# Altium PCB nRF-Intro-PCB.PcbDoc (part 1 of 2)
Units mil, origin at the board's own origin, x right, y up, seen from the top; angles counter-clockwise.
Board outline 1445.74 x 1165.1 mil, 6 copper layers (Top Layer, L2, L3, L4, L5, Bottom Layer), stack 61.312 mil thick; 53 components, 64 nets, 253 pads, 226 vias.
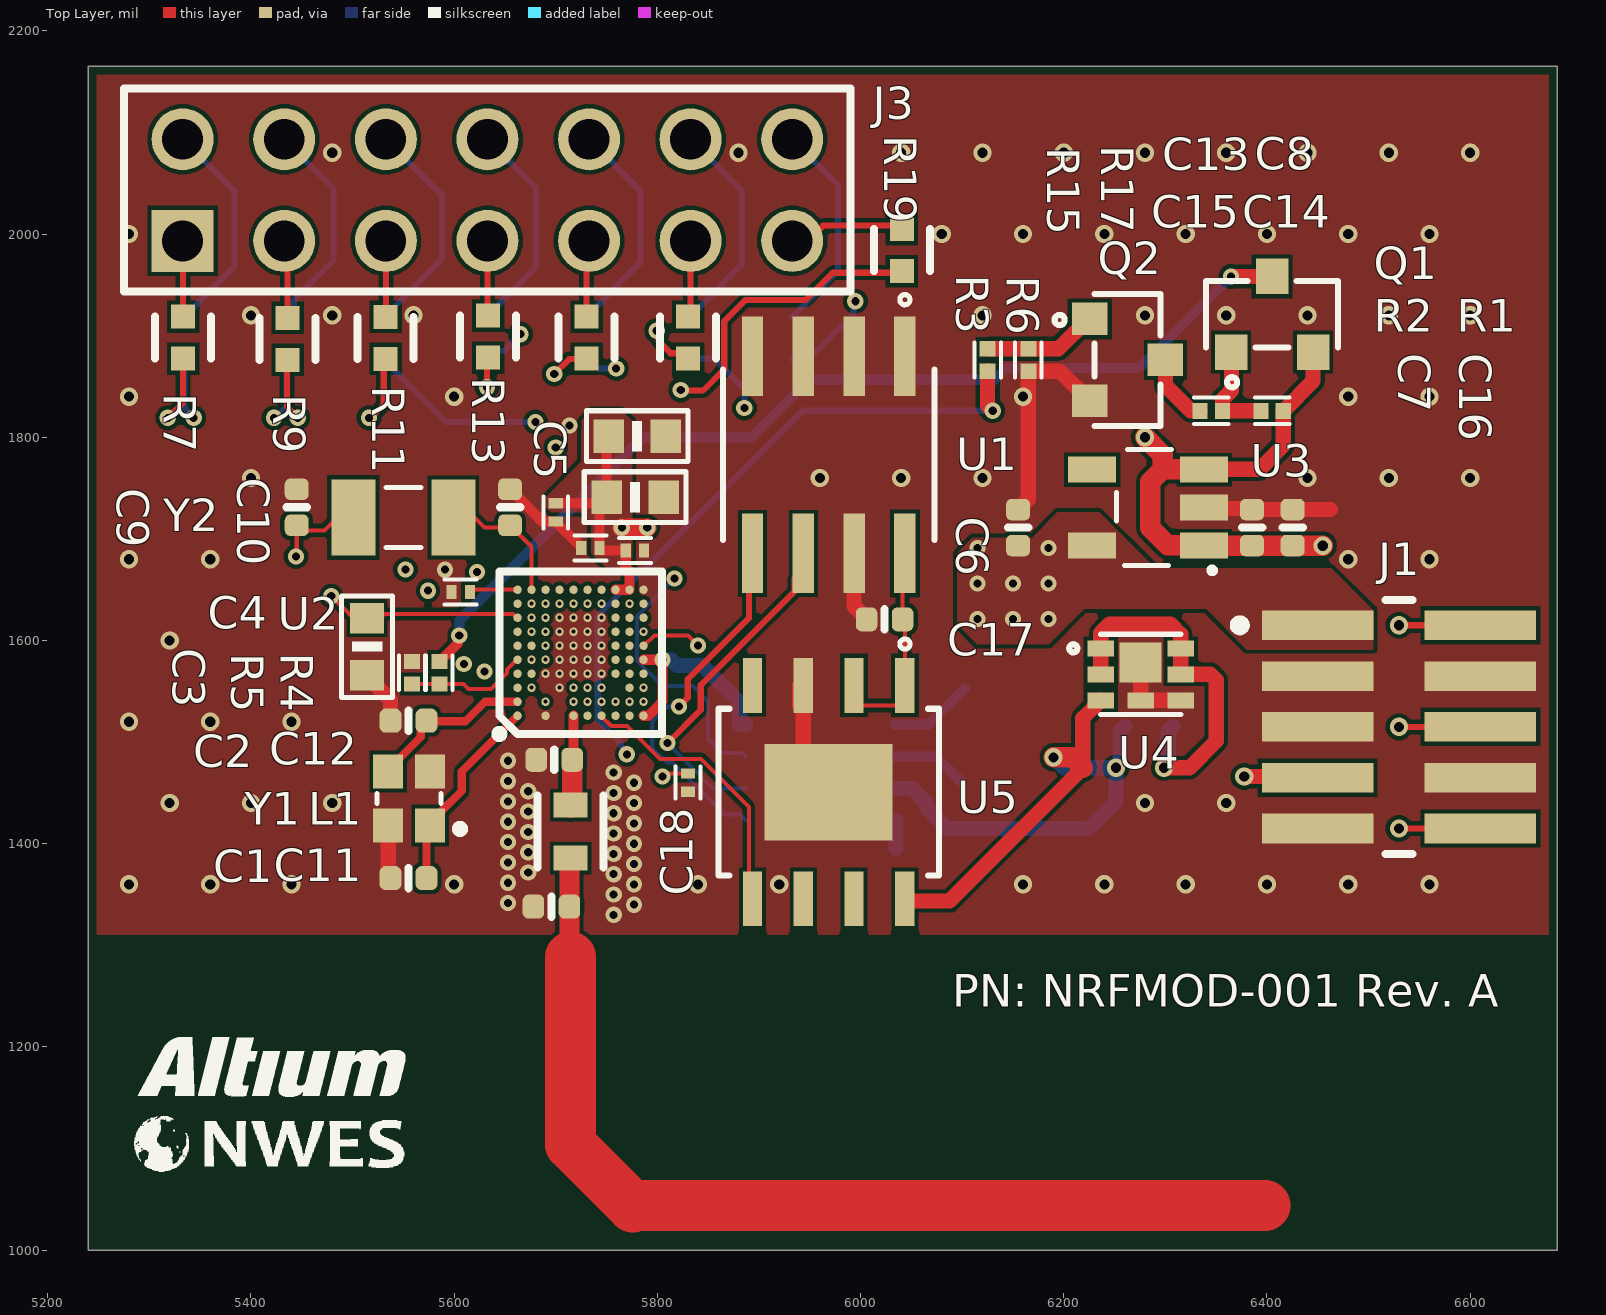
[diagram p0: Top Layer view]
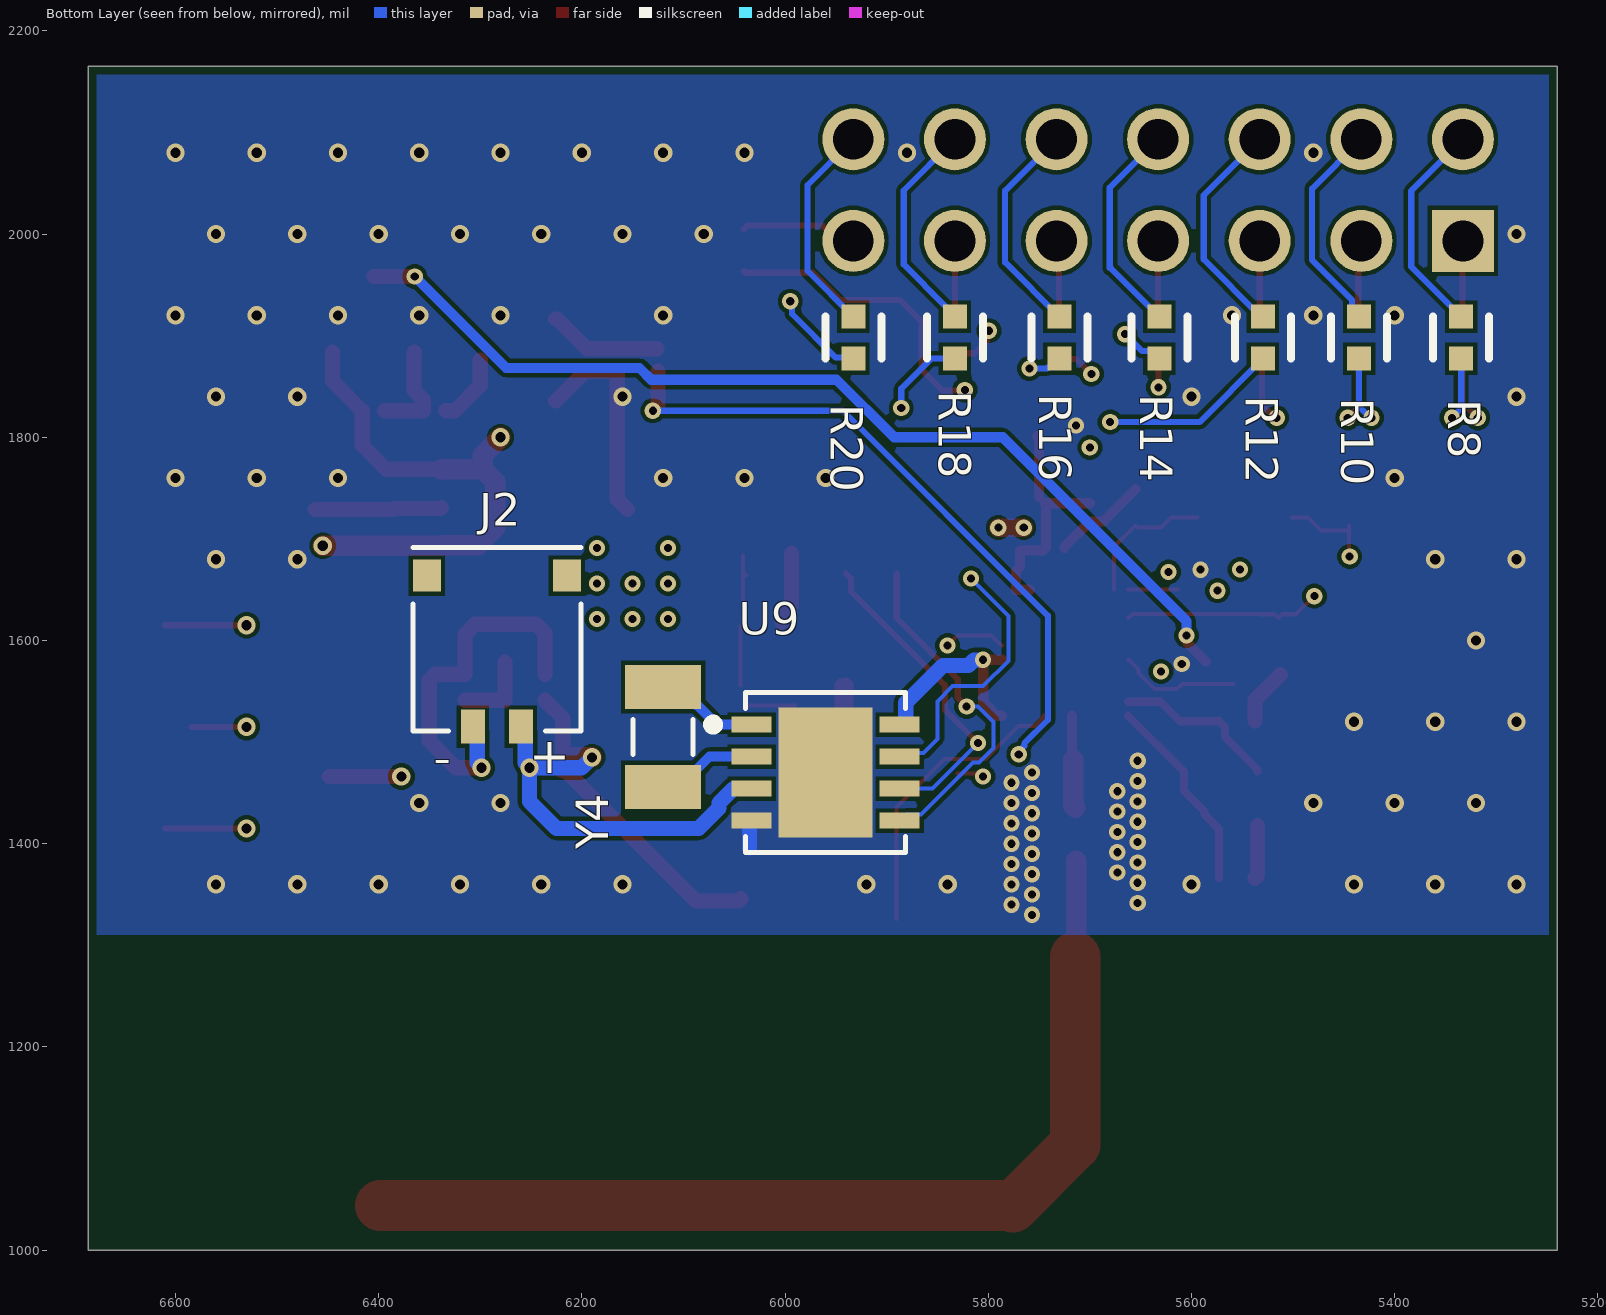
[diagram p1: Bottom Layer view, seen from below]
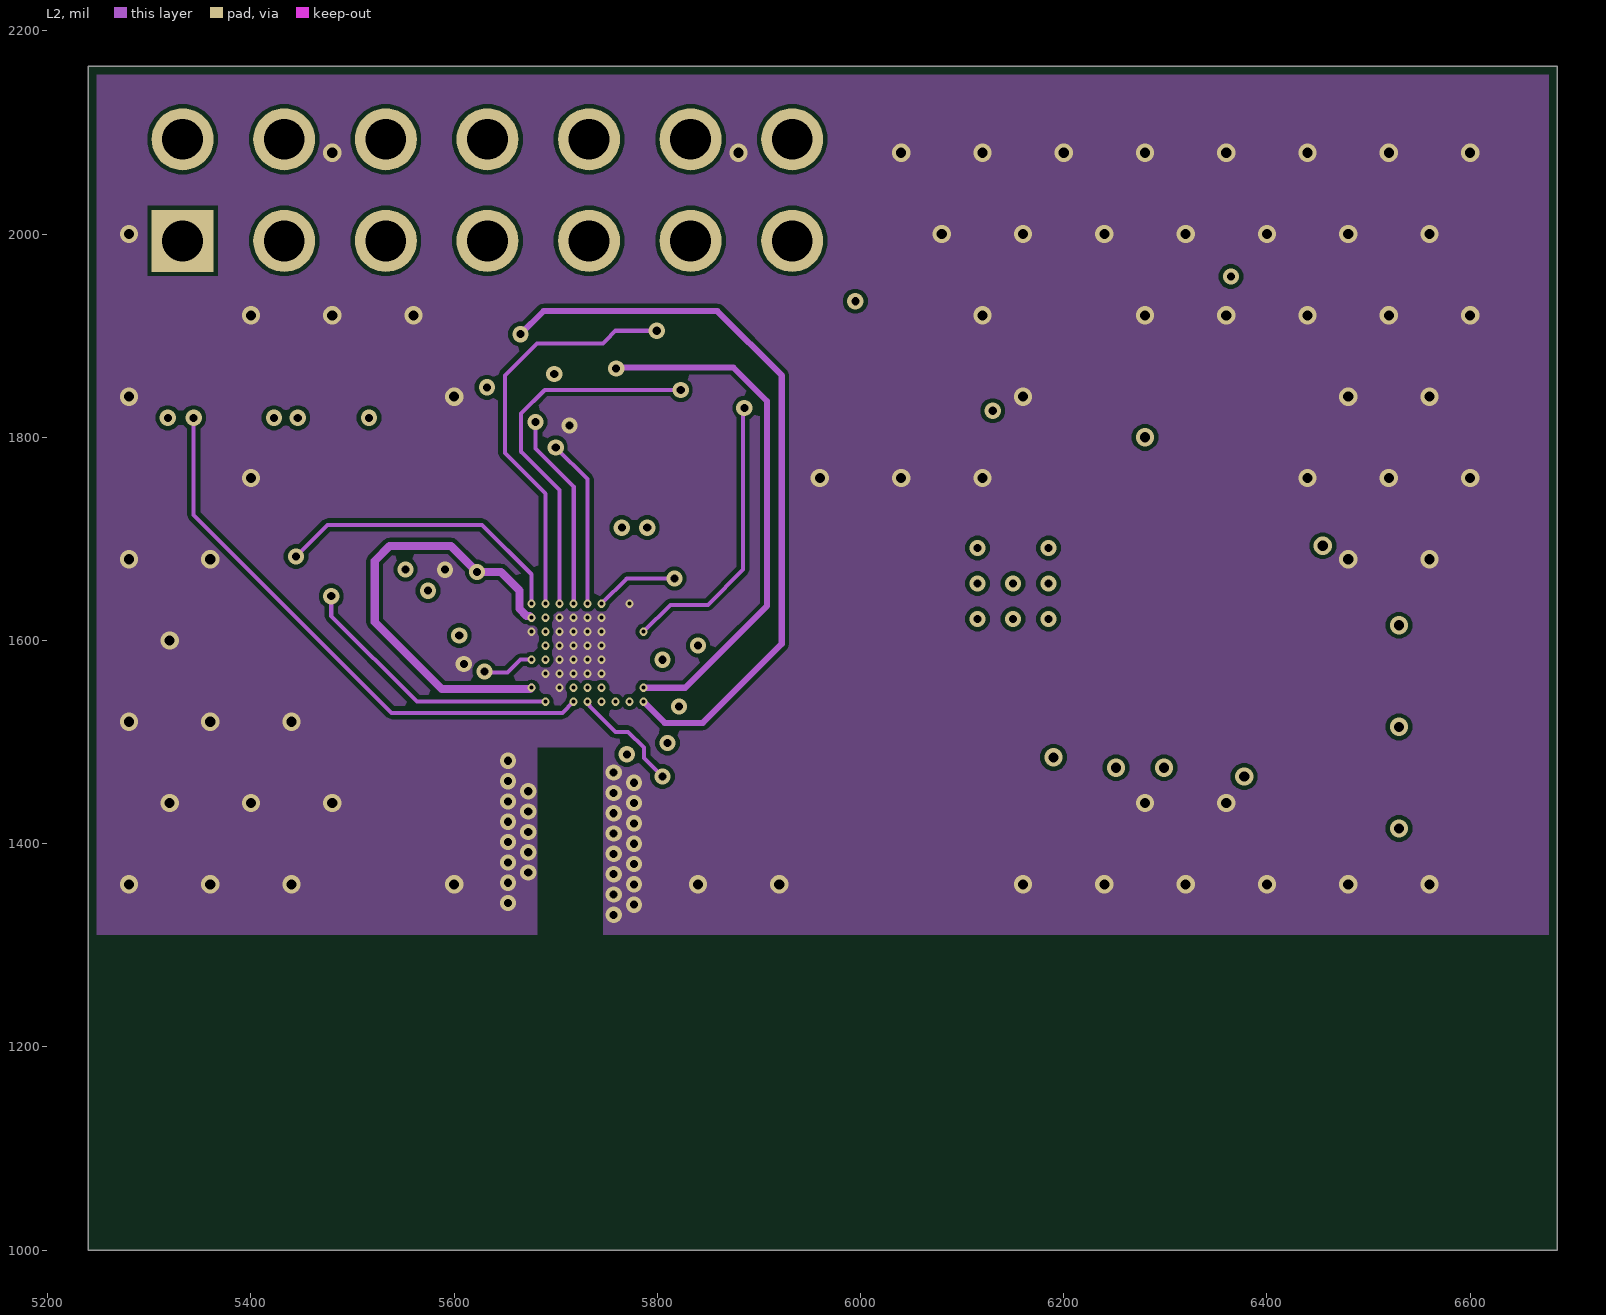
[diagram p2: L2]
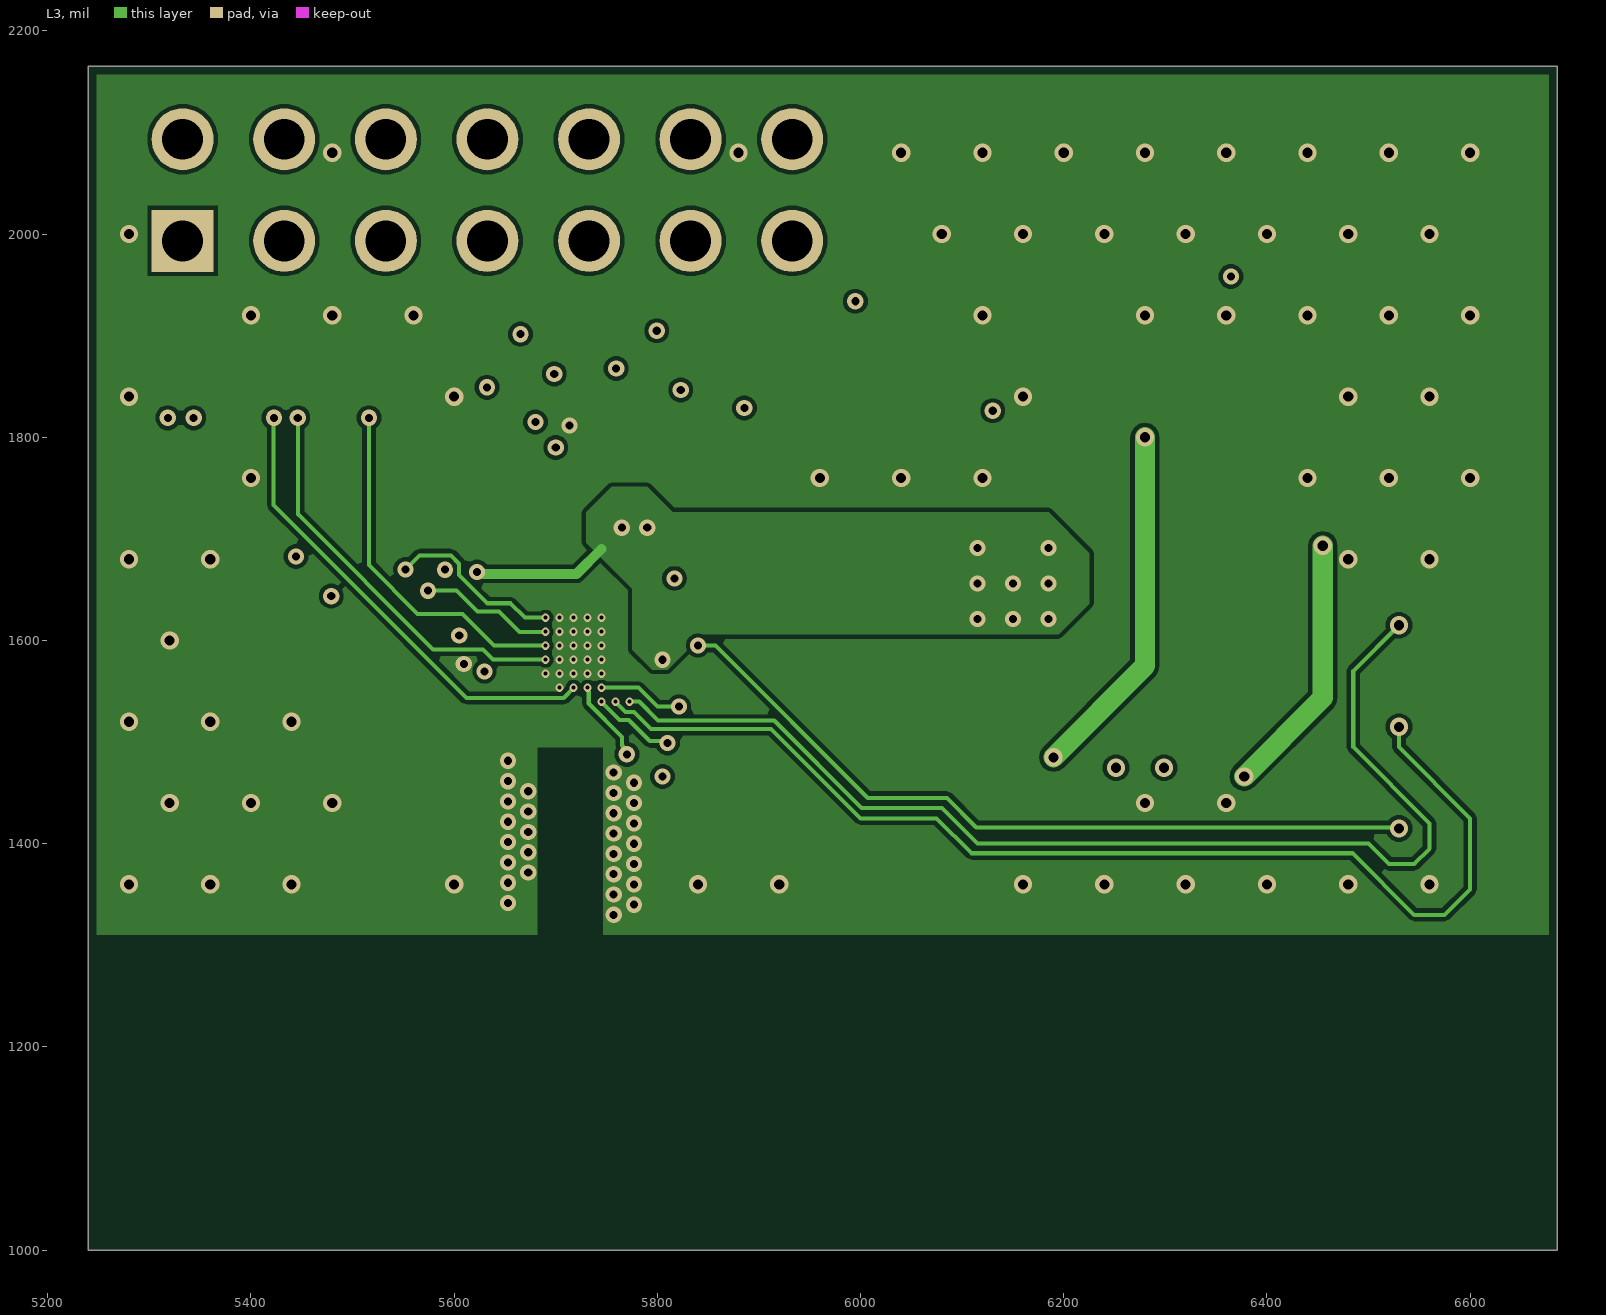
[diagram p3: L3]
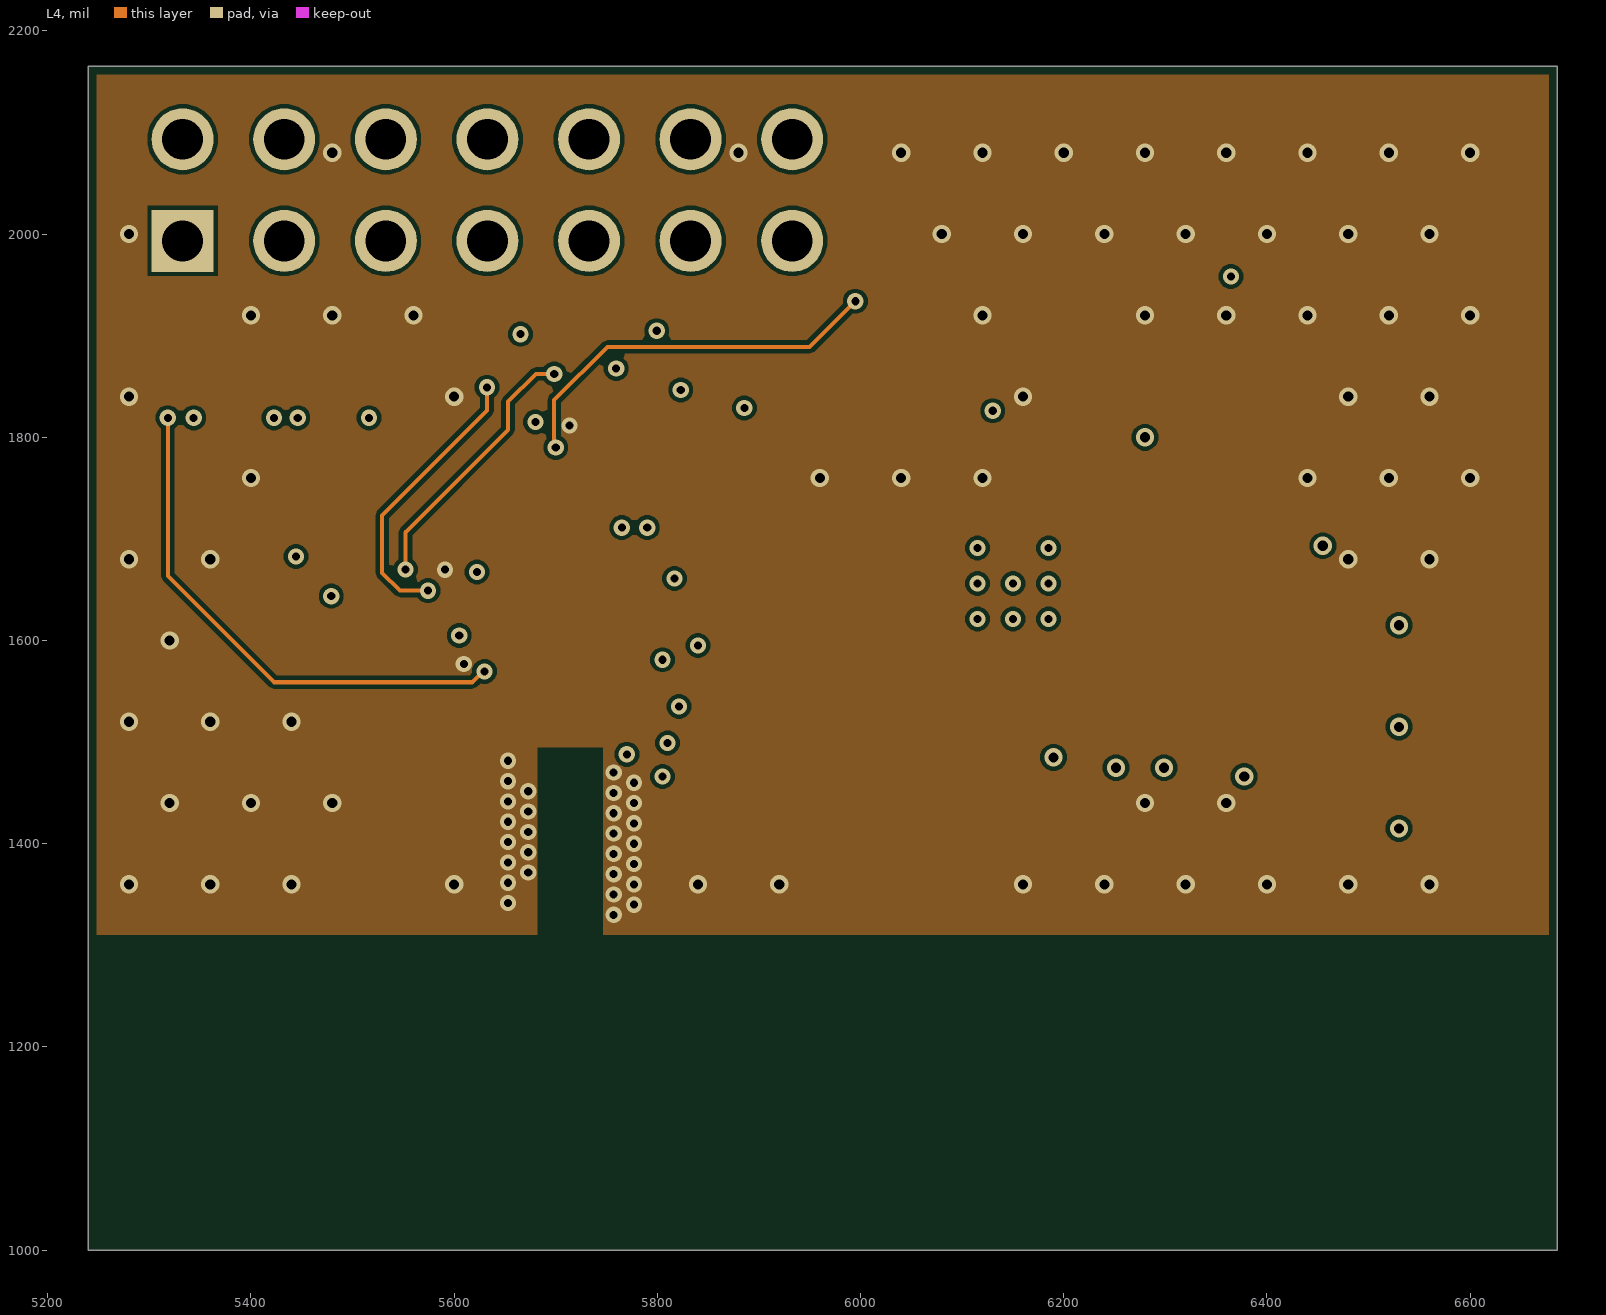
[diagram p4: L4]
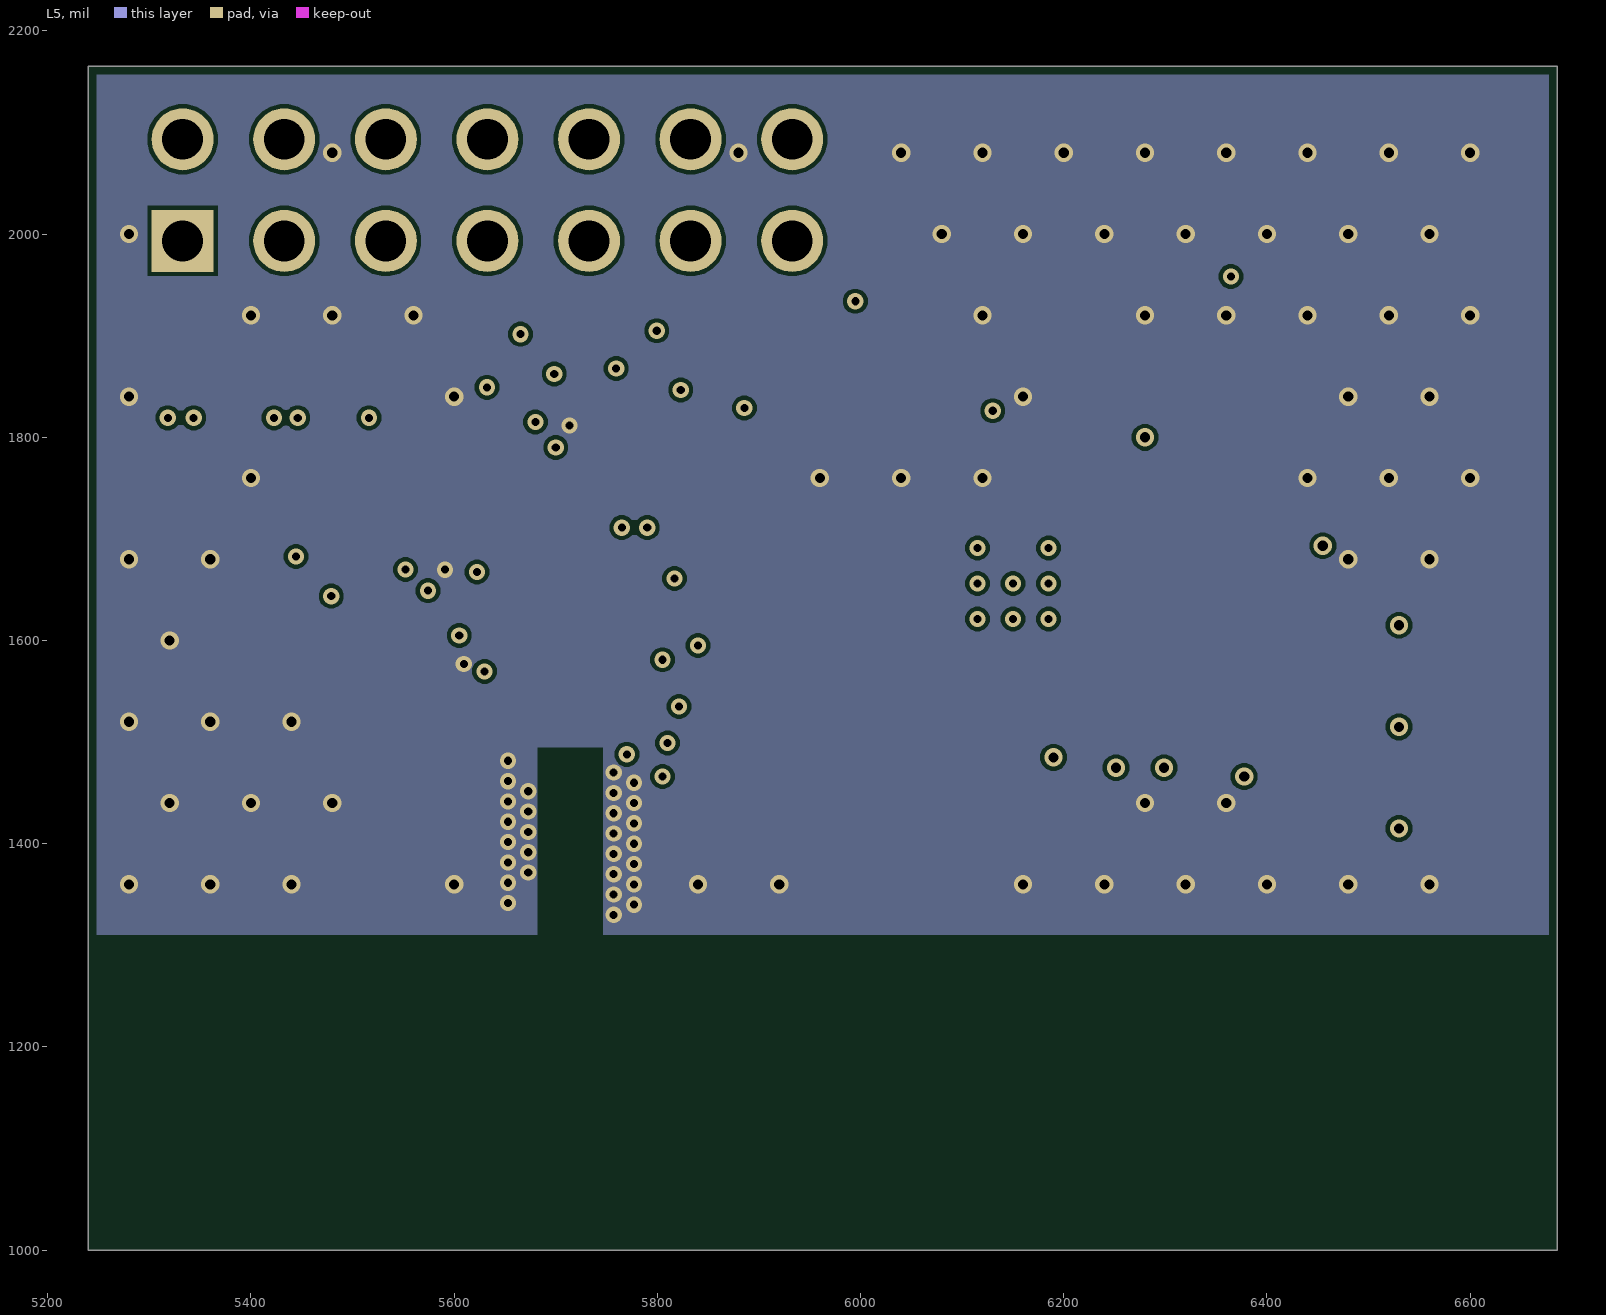
[diagram p5: L5]
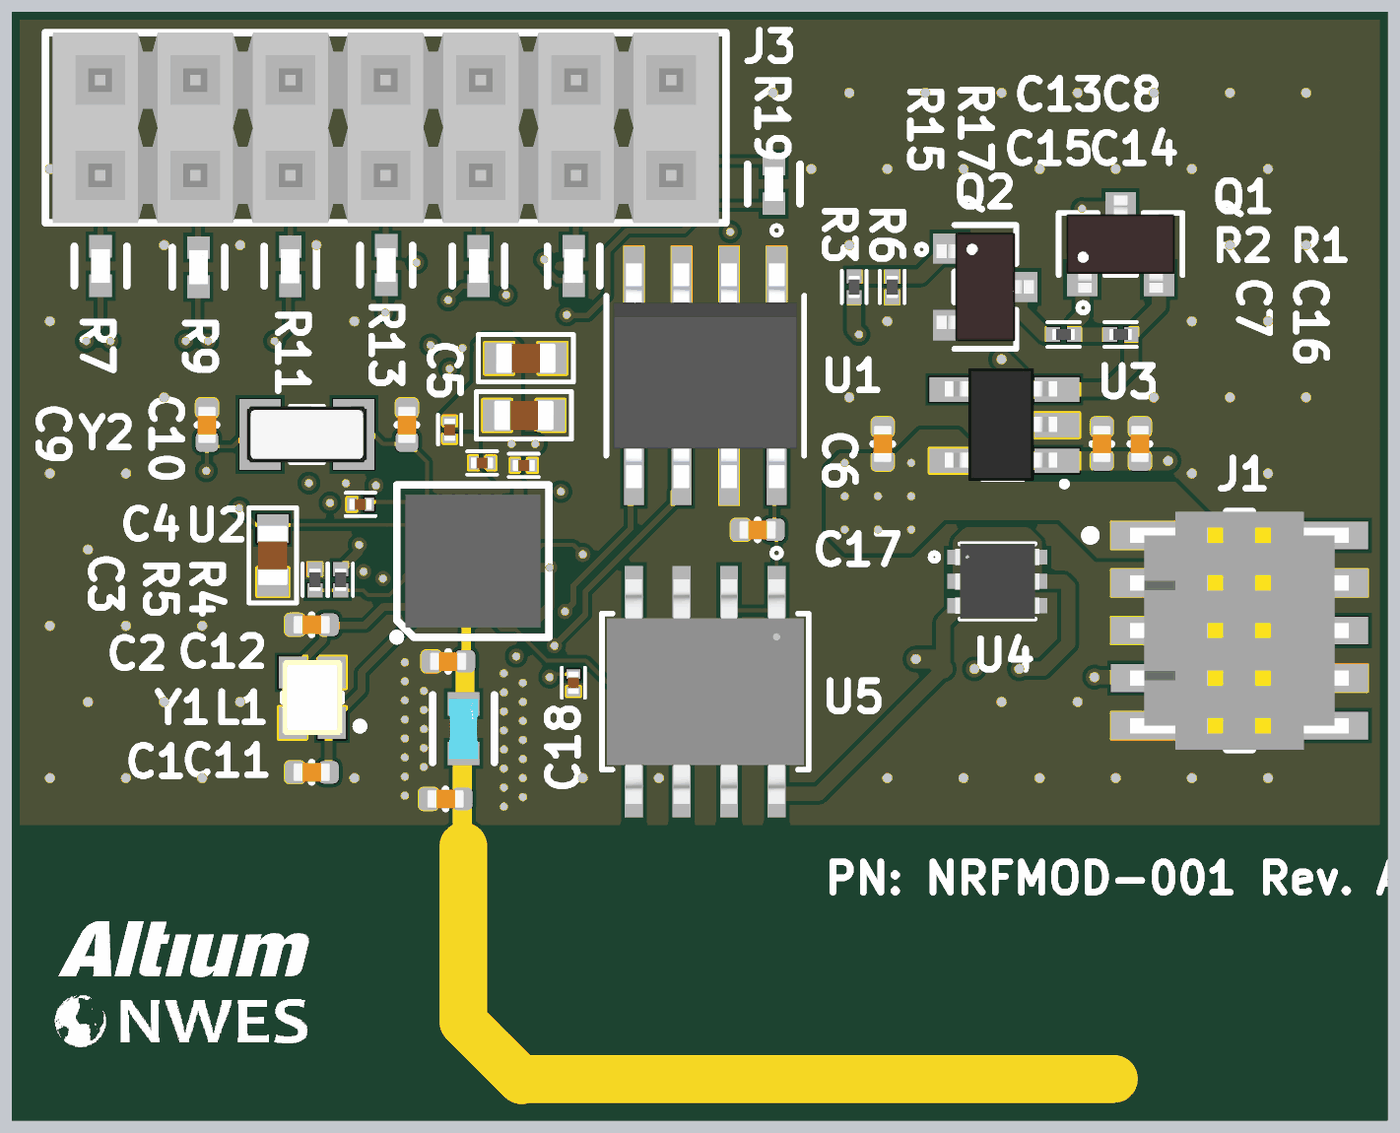
[diagram p6: 3D render of the assembled board from above, using the file's embedded part models]
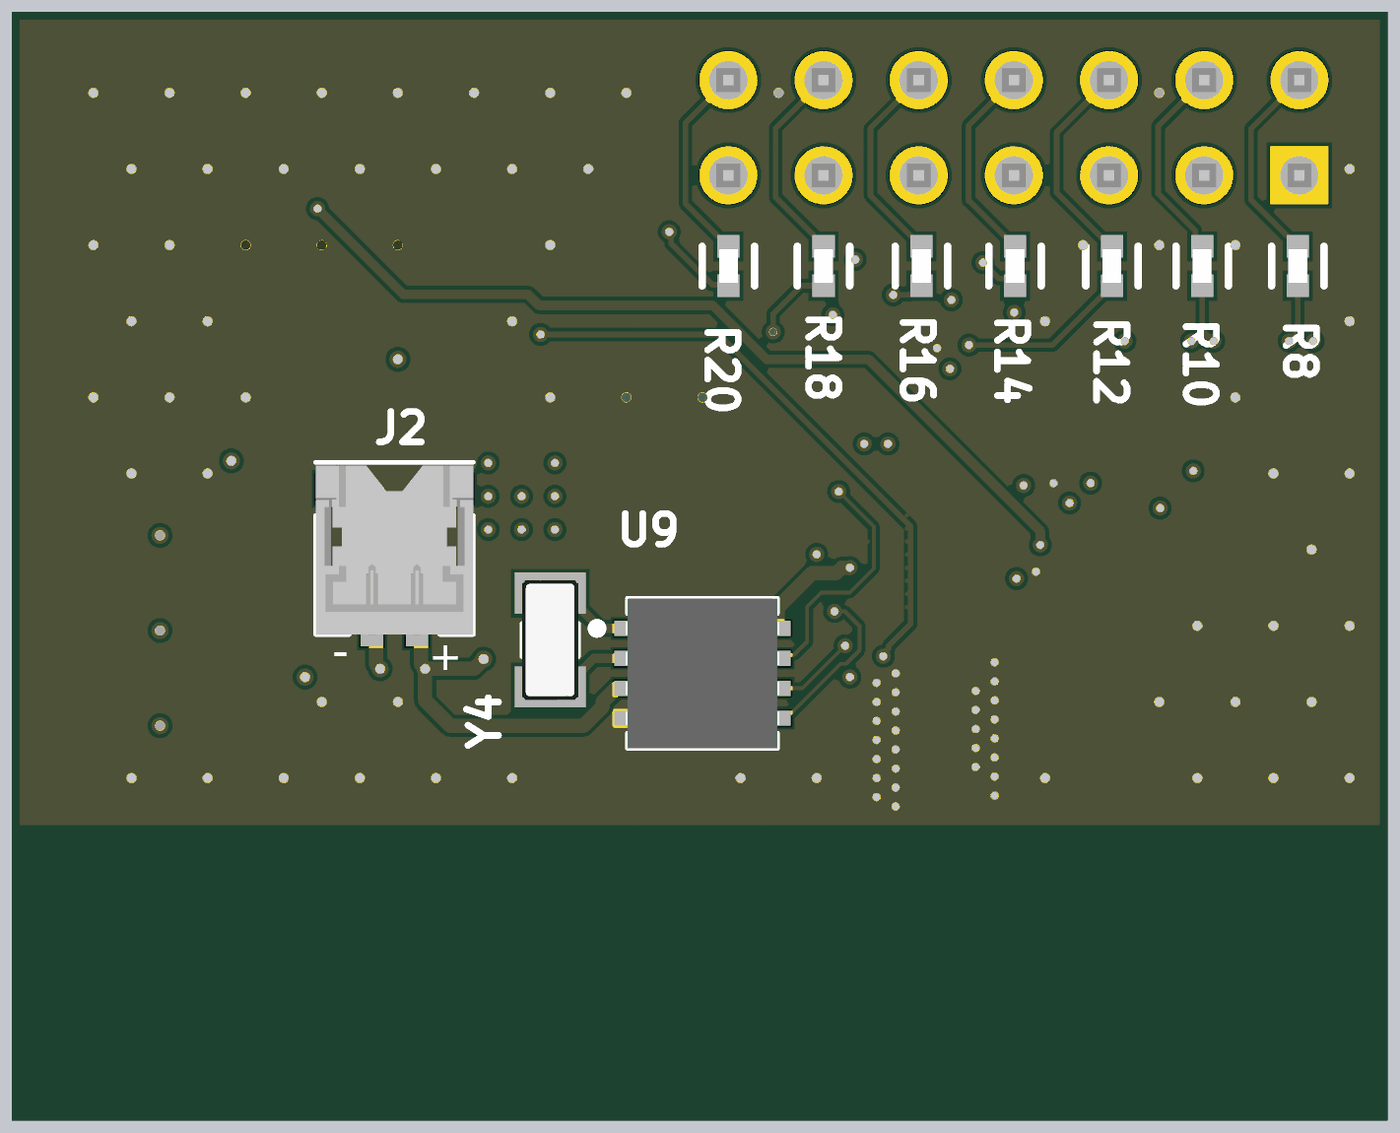
[diagram p7: 3D render of the assembled board from below, using the file's embedded part models]

## Layer stack, top to bottom
Top Solder: solder mask 0.4, Solder Resist, Dk 3.5
Top Layer: signal copper 1.4
Dielectric 2: prepreg 4, PP-006, Dk 4
L2: signal copper 1.378
Dielectric 4: prepreg 4, PP-006, Dk 4
L3: signal copper 1.378
Dielectric 1: dielectric 37, FR-4, Dk 4.8
L4: signal copper 1.378
Dielectric 5: prepreg 4, PP-006, Dk 4
L5: signal copper 1.378
Dielectric 3: prepreg 4, PP-006, Dk 4
Bottom Layer: signal copper 1.4
Bottom Solder: solder mask 0.4, Solder Resist, Dk 3.5

## Board outline
5240,1000 5240,2165.1 6685.73,2165.1 6685.73,1000

## Design rules (kind name [scope] priority, off if disabled: settings)
BoardOutlineClearance [All] p1: gap=8 ignorepadtopadclearanceinfootprint=FALSE
Clearance [All] p1: gap=4 ignorepadtopadclearanceinfootprint=TRUE
HoleToHoleClearance HoleToHoleBuried [InDrillLayerPair('L2 - L3') vs InDrillLayerPair('Top Layer - Bottom Layer')] p1 off: gap=10 allowstackedmicrovias=TRUE
HoleToHoleClearance HoleToHoleBlind [InDrillLayerPair('Top Layer - L2') vs InDrillLayerPair('L2 - L3')] p2 off: gap=0 allowstackedmicrovias=TRUE
HoleToHoleClearance [All] p3 off: gap=10 allowstackedmicrovias=TRUE
MinimumSolderMaskSliver [All] p1: minsoldermaskwidth=1
NetAntennae [InNet('ANT')] p1: netantennaetolerance=99999
PlaneClearance [All] p1: clearance=10
PlaneConnect [All] p1: planeconnectstyle=Direct reliefexpansion=20 reliefentries=4 reliefconductorwidth=10 reliefairgap=10
PolygonConnect [All] p1: connectstyle=Direct reliefconductorwidth=10 reliefentries=4 polygonreliefangle="90 Angle" airgapwidth=10
RoutingVias [All] p1: holewidth=28 width=50 viastyle="Through Hole" minholewidth=4 minwidth=8 maxholewidth=10 maxwidth=18
SilkToSilkClearance [All] p1: silktosilkclearance=4
SilkToSolderMaskClearance [IsPad] p1: minsilkscreentomaskgap=1 clearancetoexposedcopper=TRUE
SolderMaskExpansion SolderMaskExpansion_1 [IsVia] p1: expansion=4 istentingtop=TRUE
SolderMaskExpansion [All] p2: expansion=1 istentingtop=FALSE
Width Width_ANT [InNet('ANT')] p1: maxlimit=50 minlimit=8 preferedwidth=10
Width [All] p2: maxlimit=20 minlimit=4 preferedwidth=6
23 further rules are at their usual default settings.

## Components (designator, comment, footprint, x,y, rotation, side; value= is the part's Value field where it differs from the comment)
C1 "12pF" CAPC1005X55USR 5555.1,1366.09 r180 top
C2 "12pF" CAPC1005X55USR 5555.1,1521.09 r180 top
C3 "1.0uF" CAPC1608 5514.27,1593.96 r270 top
C4 "0.1uF" CAPC0603X33N 5606.43,1647.64 r180 top
C5 "0.1uF" CAPC0603X33N 5700.1,1726.09 r270 top
C6 "2.2uF" CAPC1005X55USR 6155.1,1711.09 r270 top
C7 "1uF" CAPC1005X55USR 6385.37,1711.09 r270 top
C8 "1.0uF" CAPC1608 5778.1,1741.09 r0 top
C9 "12pF" CAPC1005X55USR 5445.1,1731.09 r90 top
C10 "12pF" CAPC1005X55USR 5655.1,1731.09 r90 top
C11 "1.2pF" CAPC1005X55USR 5695.8,1338.08 r0 top
C12 "1.2pF" CAPC1005X55USR 5698.56,1482.62 r0 top
C13 "4.7uF" CAPC1608 5780.1,1801.09 r180 top
C14 "0.1uF" CAPC0603X33N 5777.95,1688.53 r180 top
C15 "0.1uF" CAPC0603X33N 5734.17,1691.09 r0 top
C16 "1uF" CAPC1005X55USR 6425.37,1711.09 r270 top
C17 "1uF" CAPC1005X55USR 6023.68,1620.78 r0 top
C18 "820pF" CAPC0603X33N 5830.1,1460.15 r270 top
J1 "FTSH-105-01-F-DV-K" SMTC-FTSH-105-01-L-DV-K_V 6530,1515 r270 top
J2 "0781710002" MOLEX_0781710002 6283.62,1663.75 r0 bottom
J3 "MTSW-107-07-L-D-170" SMTC-MTSW-107-07-X-D-170 5332.81,1993.33 r0 top
L1 "54060392400" FP-LQW18AN_00-MFG 5714.68,1411.89 r90 top
Q1 "MMBT3906,215" SOT-23 6405.1,1921.09 r0 top
Q2 "MMBT3904,215" SOT-23 6262.9,1876.09 r270 top
R1 "100K" RESC0603X26N 6405.1,1826.09 r0 top
R2 "12K" RESC0603X26N 6345.1,1826.09 r0 top
R3 "12K" RESC0603X26N 6125.1,1876.09 r90 top
R4 "12K" RESC0603X26N 5585.54,1568.38 r270 top
R5 "5.6K" RESC0603X26N 5558.55,1568.38 r270 top
R6 "100K" RESC0603X26N 6165.1,1876.09 r90 top
R7 "CRCW040222R0JNED" FP-CRCW0402-e3-MFG 5333.28,1898 r90 top
R8 "CRCW040222R0JNED" FP-CRCW0402-e3-MFG 5334.46,1898 r270 bottom
R9 "CRCW040222R0JNED" FP-CRCW0402-e3-MFG 5436.13,1896.82 r90 top
R10 "CRCW040222R0JNED" FP-CRCW0402-e3-MFG 5434.93,1898 r270 bottom
R11 "CRCW040222R0JNED" FP-CRCW0402-e3-MFG 5532.71,1897.88 r90 top
R12 "CRCW040222R0JNED" FP-CRCW0402-e3-MFG 5529.71,1898 r270 bottom
R13 "CRCW040222R0JNED" FP-CRCW0402-e3-MFG 5633.51,1898.97 r90 top
R14 "CRCW040222R0JNED" FP-CRCW0402-e3-MFG 5631.6,1898 r270 bottom
R15 "CRCW040222R0JNED" FP-CRCW0402-e3-MFG 5730.45,1898 r90 top
R16 "CRCW040222R0JNED" FP-CRCW0402-e3-MFG 5729.94,1898 r270 bottom
R17 "CRCW040222R0JNED" FP-CRCW0402-e3-MFG 5830.34,1898 r90 top
R18 "CRCW040222R0JNED" FP-CRCW0402-e3-MFG 5832.81,1898 r270 bottom
R19 "CRCW040222R0JNED" FP-CRCW0402-e3-MFG 6040.66,1984.2 r90 top
R20 "CRCW040222R0JNED" FP-CRCW0402-e3-MFG 5932.81,1898 r270 bottom
U1 "CAT24C512WI-GT3" SOIC-8 5968.68,1782.78 r270 top
U2 "NRF52840-CKAA-R7" BGA94C35P10X10_354X361X51 5724.43,1587.98 r90 top
U3 "TPS70933DBVR" SOT23-5 6283.02,1730.79 r90 top
U4 "FR015L3EZ" MLP6_2X2_ONS 6275.73,1566.68 r0 top
U5 "BD33HC0MEFJ-ME2" HTSOP-J8_ROM 5968.68,1450.78 r270 top
U9 "PCF8523TK/1,118" HVSON80P400X400X100-9N 5960,1470 r180 bottom
Y1 "32MHz" XTAL_2016_ECS_320 5555.77,1444.51 r180 top
Y2 "32.768kHz" XTAL_3215#1 5550.1,1721.09 r180 top
Y4 "32.768kHz" XTAL_3215#2 6120,1505 r90 bottom

## Footprints (in the part's own frame and the unit in brackets; to place one, negate y for a bottom-side part, rotate by r counter-clockwise, add the part's x,y. Pads: shape width x height; smd on the part's side, far side on the other; paste and mask are expansions set on the pad)
BGA94C35P10X10_354X361X51 [mm]
  round 0.212 smd mask+0.025: A1(-1.575,1.575) A2(-1.225,1.575) A3(-0.875,1.575) A4(-0.525,1.575) A5(-0.175,1.575) A6(0.175,1.575) A7(0.525,1.575) A8(0.875,1.575) A9(1.225,1.575) A10(1.575,1.575) B3(-0.875,1.225) B4(-0.525,1.225) B5(-0.175,1.225) B6(0.175,1.225) B7(0.525,1.225) B8(0.875,1.225) B9(1.225,1.225) B10(1.575,1.225) C1(-1.575,0.875) C2(-1.225,0.875) C4(-0.525,0.875) C5(-0.175,0.875) C6(0.175,0.875) C7(0.525,0.875) C8(0.875,0.875) C9(1.225,0.875) C10(1.575,0.875) D3(-0.875,0.525) D4(-0.525,0.525) D5(-0.175,0.525) D6(0.175,0.525) D7(0.525,0.525) D8(0.875,0.525) D9(1.225,0.525) D10(1.575,0.525) E1(-1.575,0.175) E2(-1.225,0.175) E3(-0.875,0.175) E4(-0.525,0.175) E5(-0.175,0.175) E6(0.175,0.175) E7(0.525,0.175) E8(0.875,0.175) E9(1.225,0.175) E10(1.575,0.175) F1(-1.575,-0.175) F2(-1.225,-0.175) F3(-0.875,-0.175) F4(-0.525,-0.175) F5(-0.175,-0.175) F6(0.175,-0.175) F7(0.525,-0.175) F8(0.875,-0.175) F9(1.225,-0.175) F10(1.575,-0.175) G1(-1.575,-0.525) G2(-1.225,-0.525) G3(-0.875,-0.525) G4(-0.525,-0.525) G5(-0.175,-0.525) G6(0.175,-0.525) G7(0.525,-0.525) G8(0.875,-0.525) G9(1.225,-0.525) G10(1.575,-0.525) H1(-1.575,-0.875) H2(-1.225,-0.875) H4(-0.525,-0.875) H5(-0.175,-0.875) H6(0.175,-0.875) H7(0.525,-0.875) H8(0.875,-0.875) H9(1.225,-0.875) H10(1.575,-0.875) J1(-1.575,-1.225) J2(-1.225,-1.225) J3(-0.875,-1.225) J4(-0.525,-1.225) J5(-0.175,-1.225) J6(0.175,-1.225) J7(0.525,-1.225) J8(0.875,-1.225) J9(1.225,-1.225) J10(1.575,-1.225) K1(-1.575,-1.575) K2(-1.225,-1.575) K3(-0.875,-1.575) K4(-0.525,-1.575) K5(-0.175,-1.575) K6(0.175,-1.575) K7(0.525,-1.575) K8(0.875,-1.575) K9(1.225,-1.575) K10(1.575,-1.575)
  silkscreen extent -2.13,-2.03 2.03,2.13, body extent -1.77,-1.8 1.77,1.8, height 0.51
CAPC0603X33N [mil]
  rect 10x14 smd mask+2: 1(-9.06,0) 2(9.06,0)
  silkscreen extent -16,-12 16,12, body extent -12,-6 12,6, height 13
CAPC1005X55USR [mm] "Capacitor, Chip; 1.00 mm L X 0.50 mm W X 0.55 mm H body"
  rrect52% 0.54x0.6 smd mask+0.025: 1(-0.45,0) 2(0.45,0)
  silkscreen extent 0,-0.25 0,0.25, body extent -0.5,-0.25 0.5,0.25, height 0.55
CAPC1608 [mil] "C0603"
  rect 30x33 smd mask+2: 1(-28,0) 2(28,0)
  silkscreen extent -50,-25 50,25, body extent -31,-16 31,16, height 35
FP-CRCW0402-e3-MFG [mm]
  rect 0.6x0.6 smd paste+0 mask+0: 1(-0.525,0) 2(0.525,0)
  silkscreen extent -0.53,-0.7 0.53,0.7, body extent -0.92,-0.4 0.92,0.4, height 0.25
FP-LQW18AN_00-MFG [mm]
  rect 0.625x0.85 smd paste+0 mask+0: 1(-0.663,0) 2(0.663,0)
  silkscreen extent -0.9,-0.82 0.9,0.82, body extent -1.07,-0.6 1.07,0.6, height 0.25
HTSOP-J8_ROM [mil]
  rect 54x19 smd paste+0 mask+0: 1(-105,75) 2(-105,25) 3(-105,-25) 4(-105,-75) 5(105,-75) 6(105,-25) 7(105,25) 8(105,75)
  rect 95x126 smd paste-62.5 mask+0: 9(0,0)
  silkscreen extent -151,-109 82,109, body extent -118,-104 118,104, height 39
HVSON80P400X400X100-9N [mm]
  rect 1x0.4 smd mask+0.051: 1(-1.85,1.2) 2(-1.85,0.4) 3(-1.85,-0.4) 4(-1.85,-1.2) 5(1.85,-1.2) 6(1.85,-0.4) 7(1.85,0.4) 8(1.85,1.2)
  rect 2.35x3.25 smd mask+0.051: 9(0,0)
  silkscreen extent -2.94,-2 2,2, body extent -2.05,-2 2.05,2, height 1
MLP6_2X2_ONS [mm]
  rect 0.67x0.4 smd paste+0 mask+0: 1(-1,0.65) 2(-1,0) 3(-1,-0.65) 4(1,-0.65) 5(1,0) 6(1,0.65)
  rect 0.66x0.4 smd paste+0 mask+0: 7(0,-0.65)
  rect 1.05x1 smd paste+0 mask+0: 7(0,0.3)
  silkscreen extent -1.79,-1 1,1, body extent -1.12,-1 1.12,1, height 0.81
MOLEX_0781710002 [mm]
  rect 0.6x0.85 smd mask+0.051: 1(-0.6,3.775) 2(0.6,3.775)
  rect 0.7x0.8 smd mask+0.051: S1(-1.75,0) S2(1.75,0)
  silkscreen extent -2.1,-0.71 2.1,3.88, body extent -2.1,-0.62 2.1,3.91, height 1.45
RESC0603X26N [mm]
  rect 0.38x0.4 smd mask+0.025: 1(-0.281,0) 2(0.281,0)
  silkscreen extent -0.43,-0.33 0.43,0.33, body extent -0.3,-0.15 0.3,0.15, height 0.26
SMTC-FTSH-105-01-L-DV-K_V [mm] "CONN, 10-Leads, Body 6.35x3.43mm, Pitch 1.27mm"
  rect 0.74x2.79 smd: 1(-2.54,-2.035) 2(-2.54,2.035) 3(-1.27,-2.035) 4(-1.27,2.035) 5(0,-2.035) 6(0,2.035) 7(1.27,-2.035) 8(1.27,2.035) 9(2.54,-2.035) 10(2.54,2.035)
  silkscreen extent -3.17,-4.1 3.17,0.34, body extent -3.17,-2.92 3.18,2.92, height 6.12
SMTC-MTSW-107-07-X-D-170 [mm] "Assembly .025\" [.64] SQ Post Terminal Strip, 2x7 Pins, Vertical, 2.54mm Pitch, Male"
  rect 1.55x1.55 hole 1.02: 1(0,0)
  round 1.55 hole 1.02: 2(0,2.54) 3(2.54,0) 4(2.54,2.54) 5(5.08,0) 6(5.08,2.54) 7(7.62,0) 8(7.62,2.54) 9(10.16,0) 10(10.16,2.54) 11(12.7,0) 12(12.7,2.54) 13(15.24,0) 14(15.24,2.54)
  silkscreen extent -1.46,-1.27 16.7,3.81, body extent -1.27,-1.27 16.51,3.81, height 6.86
SOIC-8 [mil]
  rect 78x21 smd: 1(-97,75) 2(-97,25) 3(-97,-25) 4(-97,-75) 5(97,-75) 6(97,-25) 7(97,25) 8(97,75)
  silkscreen extent -158,-104 84,104, body extent -118,-97 118,97, height 69
SOT23-5 [mm]
  rect 0.65x1.2 smd mask+0.05: 1(-0.95,-1.4) 2(0,-1.4) 3(0.95,-1.4) 4(0.95,1.4) 5(-0.95,1.4)
  silkscreen extent -1.59,-1.62 1.45,0.79, body extent -1.48,-1.41 1.52,1.59, height 1.4
SOT-23 [mil]
  rect 32x35 smd paste+0 mask+0: 1(-40.35,-37.2) 2(40.35,-37.2) 3(0,37.2)
  silkscreen extent -65,-72 65,33, body extent -57,-51 57,51, height 45
XTAL_2016_ECS_320 [mm]
  rect 0.75x0.85 smd mask+0.051: 1(-0.525,0.675) 2(-0.525,-0.675) 3(0.525,-0.675) 4(0.525,0.675)
  silkscreen extent -1.37,-0.12 0.8,0.86, body extent -0.8,-1 0.8,1, height 0.5
XTAL_3215#1 [mm]
  rect 1.1x1.9 smd: 1(-1.25,0) 2(1.25,0)
  silkscreen extent -0.44,-0.75 0.44,0.75, body extent -1.6,-0.75 1.6,0.75, height 0.89
XTAL_3215#2 [mm]
  rect 1.1x1.9 smd mask+0: 1(-1.25,0) 2(1.25,0)
  silkscreen extent -0.44,-0.75 0.44,0.75, body extent -1.6,-0.75 1.6,0.75, height 0.89

## Part data
C1 C2 C9 C10: library part "CAP CER 12PF 50V C0G/NP0 0402", "CAP CER 12PF 50V C0G/NP0 0402", Manufacturer=YAGEO, Manufacturer Part Number=CC0402GRNPO9BN120, Package=0402, Supplier Part Number 1=311-3609-1-ND, Height=0.55mm, Supplier 1=Digi-Key
C3 C8: library part "CAP CER 1UF 16V X7R 0603", "CAP CER 1UF 16V X7R 0603", Manufacturer=KEMET, Manufacturer Part Number=C0603C105K4RAC7867, Package=0603, Supplier Part Number 1=399-C0603C105K4RAC7867CT-ND, Height=0.9mm, Supplier 1=Digi-Key
C4 C5 C14 C15: library part "CAP CER 0.1UF 6.3V X7R 0201", "CAP CER 0.1UF 6.3V X7R 0201", Manufacturer=YAGEO, Manufacturer Part Number=CC0201KRX7R5BB104, Package=0201, Supplier Part Number 1=13-CC0201KRX7R5BB104CT-ND, Height=0.33mm, Supplier 1=Digi-Key
C6: library part "CAP CER 2.2UF 25V X5R 0402", "CAP CER 2.2UF 25V X5R 0402", Manufacturer="Murata Electronics", Manufacturer Part Number=GRM155R61E225ME15D, Package=0402, Supplier Part Number 1=490-10457-1-ND, Height=0.55mm, Supplier 1=Digi-Key
C7 C16 C17: library part "CAP CER 1UF 25V X5R 0402", "CAP CER 1UF 25V X5R 0402", Manufacturer="Murata Electronics", Manufacturer Part Number=GRM155C81E105ME11J, Package=0402, Supplier Part Number 1=490-GRM155C81E105ME11JCT-ND, Height=0.6mm, Supplier 1=Digi-Key
C11 C12: library part "CAP CER 1.2PF 50V C0G/NP0 0402", "CAP CER 1.2PF 50V C0G/NP0 0402", Manufacturer="Murata Electronics", Manufacturer Part Number=GCM1555C1H1R2BA16D, Package=0402, Supplier Part Number 1=490-16453-1-ND, Height=0.55mm, Supplier 1=Digi-Key
C13: library part "CAP CER 4.7UF 6.3V X7R 0603", "CAP CER 4.7UF 6.3V X7R 0603", Manufacturer="Taiyo Yuden", Manufacturer Part Number=JMK107BB7475KA-T, Package=0603, Supplier Part Number 1=587-5870-1-ND, Height=1.0mm, Supplier 1=Digi-Key
C18: library part "CAP CER 820PF 25V X7R 0201", "CAP CER 820PF 25V X7R 0201", Manufacturer=YAGEO, Manufacturer Part Number=CC0201KRX7R8BB821, Package=0201, Supplier Part Number 1=311-3698-1-ND, Height=0.33mm, Supplier 1=Digi-Key
J1: library part CMP-2000-05352-1, "Male Header, Pitch 1.27 mm, 2 x 5 Position, Height 6.12 mm, RoHS, Tube", Color=Black, Manufacturer=Samtec, Package Description="Male Header, Pitch 1.27 mm, 2 x 5 Position, Height 5.97 mm, Tail Length 4.32 mm", Package Reference=FTSH-105-01-L-DV-K, Category=Connectors,Interconnects, Connector Type=Header,Shrouded, Contact Finish=Gold, Contact Finish Thickness=3µin(0.08µm), Contact Mating Length="0.120\"(3.05mm)", Contact Type=MalePin, Datasheet URL=http://suddendocs.samtec.com/prints/ftsh-1xx-xx-xxx-dv-xxx-mkt.pdf, Datasheet Version="Rev. ET, 10/1995", Family=RectangularConnectors-Headers,MalePins, Fastening Type=-, Features=-, Manufacturer URL=http://www.samtec.com/, Mounting Type=SurfaceMount, Number of Positions=10, Number of Positions Loaded=All, Number of Rows=2, Package URL=http://suddendocs.samtec.com/prints/ftsh-1xx-xx-xxx-dv-xxx-footprint.pdf, Packaging=Tube, Pitch="0.050\"(1.27mm)", Row Spacing="0.050\"(1.27mm)", Series=FTSH, Termination=Solder
J2: library part CONN_0781710002, "Pico-EZmate Wire-to-Board Header Vertical Housing Height 1.55mm with Side Friction Locks 2 Circuits", Color=Black, Contact Resistance=20mR, Manufacturer=Molex, Max Operating Temperature=85°C, Max Voltage Rating (AC)=50V, Min Operating Temperature=-25°C, Supplier Part Number 1=WM4459CT-ND, Category="Headers and Wire Housings", ComponentLink1Description=https://datasheet.ciiva.com/738/781710002-sd-738384.pdf?src-supplier=Digi-Key, ComponentLink1URL=https://datasheet.ciiva.com/738/781710002-sd-738384.pdf?src-supplier=Digi-Key, ComponentLink2Description=https://datasheet.ciiva.com/738/781710002-sd-738387.pdf?src-supplier=Digi-Key, ComponentLink2URL=https://datasheet.ciiva.com/738/781710002-sd-738387.pdf?src-supplier=Digi-Key, ComponentLink3Description=https://datasheet.ciiva.com/738/781710002-sd-738390.pdf?src-supplier=Digi-Key, ComponentLink3URL=https://datasheet.ciiva.com/738/781710002-sd-738390.pdf?src-supplier=Digi-Key, Connector Type=Plug, Contact Material="Copper Alloy", Contact Plating=Gold, Contact Type=Tab, Depth=4.5mm, Fastening Type=Friction, Housing Color=Black, Housing Material=Polymer, Length=4.2mm, Manufacturer Part Number=0781710002, Max Voltage Rating (DC)=50V, Mount="Surface Mount", Number of Contacts=2, Number of Positions=2, Number of Rows=1, Orientation=Straight, Packaging="Tape and Reel", Pitch=1.2mm, Pricing 1="1=0.40000, 10=0.32600, 100=0.23890, 1000=0.19000 (USD)", Radiation Hardening=No, RoHS=Yes, RoHS Compliant=Yes, Series="Pico-EZmate™ 78171", Stock 1=156886, Supplier 1=Digi-Key, Termination=Solder
J3: library part CMP-1024-00128-1, "Modified .025\" SQ Post Header, Through-hole, Vertical, -55 to 125 degC, 2.54 mm Pitch, 14-Pin, Male, RoHS", Manufacturer=Samtec, Temperature Range="-55 to 125 degC", ComponentLink1Description="Manufacturer URL", ComponentLink1URL=http://www.samtec.com, ComponentLink2Description=Datasheet, ComponentLink2URL=http://www.samtec.com/documents/webfiles/pdf/MTSW.PDF, ComponentLink3Description="Package Specification", ComponentLink3URL=http://www.samtec.com/documents/webfiles/cpdf/MTSW-XXX-XX-X-X-XXXX-XX-XXX-MKT1.pdf, DatasheetVersion=F-214, Mounting Technology=Through-hole, Orientation=Vertical, PackageDescription="Assembly .025\" [.64] SQ Post Terminal Strip", PackageReference=MTSW-107-07-X-D-170, PackageVersion="BI, 2/1987", PartNumber=MTSW-107-07-L-D-170, Pitch="2.54 mm", RoHS=True
L1: library part CMP-06042-012062-1, "Fixed Inductors RF Chip Inductor SMD 3.9nH 0603 10% Tol", Case Code (Imperial)=0603, Case Code (Metric)=1608, Current=200mA, Current Rating=750mA, DC Resistance (DCR)=82mR, Inductance=3.9nH, Manufacturer=Sumida, Max Operating Temperature=125°C, Min Operating Temperature=-55°C, Package Quantity=4000, Resistor Type=Wirewound, Self Resonant Frequency=6GHz, Series Resistance=35mR, Test Frequency=100MHz, Tolerance=2%, Case/Package=0603, Core Material=Non-Magnetic, DC Current=750mA, Depth=1mm, Height=0.8mm, Height - Seated (Max)=0.039inch, Lead Free="Lead Free", Length=1.6mm, Manufacturer Part  Number=54060392400, Max DC Current=750mA, Military Standard=Not, Mount="Surface Mount", Packaging="Tape and Reel", Q Factor=35, Radiation Hardening=No, Shielding=Unshielded, Termination=SMD/SMT, Weight=0.000106oz, Width=0.031inch
Q1: library part PNP_MMBT3906,215, "TRANS PNP 40V 0.2A TO236AB", Manufacturer=Nexperia, Supplier Part Number 1=1727-4045-1-ND, Category=BJTs, ComponentLink1Description=http://www.farnell.com/datasheets/454048.pdf?src-supplier=Farnell, ComponentLink1URL=http://www.farnell.com/datasheets/454048.pdf?src-supplier=Farnell, ComponentLink2Description=https://assets.nexperia.com/documents/data-sheet/MMBT3906.pdf?src-supplier=Digi-Key, ComponentLink2URL=https://assets.nexperia.com/documents/data-sheet/MMBT3906.pdf?src-supplier=Digi-Key, ComponentLink3Description=http://www.nxp.com/packings/SOT23_215.html?src-supplier=Farnell, ComponentLink3URL=http://www.nxp.com/packings/SOT23_215.html?src-supplier=Farnell, Manufacturer Part Number=MMBT3906,215, Pricing 1="1=0.14000, 10=0.12800, 100=0.06970, 500=0.04290, 1000=0.02926 (USD)", RoHS=Yes, RoHS Compliant=Yes, Stock 1=1789, Supplier 1=Digi-Key
Q2: library part NPN_MMBT3904,215, "TRANS NPN 40V 0.2A SOT23", Manufacturer=Nexperia, Supplier Part Number 1=1727-4044-1-ND, Category=BJTs, ComponentLink1Description=http://www.farnell.com/datasheets/2328888.pdf?src-supplier=Farnell, ComponentLink1URL=http://www.farnell.com/datasheets/2328888.pdf?src-supplier=Farnell, ComponentLink2Description=https://assets.nexperia.com/documents/data-sheet/MMBT3904.pdf?src-supplier=Digi-Key, ComponentLink2URL=https://assets.nexperia.com/documents/data-sheet/MMBT3904.pdf?src-supplier=Digi-Key, ComponentLink3Description=http://www.farnell.com/datasheets/2328888.pdf?src-supplier=Newark, ComponentLink3URL=http://www.farnell.com/datasheets/2328888.pdf?src-supplier=Newark, Manufacturer Part Number=MMBT3904,215, Pricing 1="1=0.13000, 10=0.11800, 100=0.06440, 500=0.03964, 1000=0.02703 (USD)", RoHS=Yes, RoHS Compliant=Yes, Stock 1=1634308, Supplier 1=Digi-Key
R1 R6: library part "RES 100K OHM 1% 1/20W 0201", "RES 100K OHM 1% 1/20W 0201", Manufacturer=Yageo, Manufacturer Part Number=RC0201FR-07100KL, Package=0201, Supplier Part Number 1=311-100KMCT-ND, Height=0.26mm, Supplier 1=Digi-Key
R2 R3 R4: library part "RES 12K OHM 1% 1/20W 0201", "RES 12K OHM 1% 1/20W 0201", Manufacturer=Yageo, Manufacturer Part Number=RC0201FR-0712KL, Package=0201, Supplier Part Number 1=311-12.0KMCT-ND, Height=0.26mm, Supplier 1=Digi-Key
R5: library part "RES 5.6K OHM 1% 1/20W 0201", "RES 5.6K OHM 1% 1/20W 0201", Manufacturer=Yageo, Manufacturer Part Number=RC0201FR-075K6L, Package=0201, Supplier Part Number 1=YAG2346CT-ND, Height=0.26mm, Supplier 1=Digi-Key
R7 R8 R9 R10 R11 R12 R13 R14 R15 R16 R17 R18 R19 R20: library part CMP-1011-00034-3, "RES Thick Film, 22Ω, 5%, 0.063W, 200ppm/°C, 0402", Case Code (Imperial)=0402, Case Code (Metric)=1005, Max Operating Temperature=155°C, Max Power Dissipation=63mW, Min Operating Temperature=-55°C, Package Quantity=1, Resistance=22R, Temperature Coefficient=200ppm/°C, Tolerance=5%, Voltage Rating=50V, Case/Package=0402, Composition="Thick Film", Contact Plating=Tin, Depth=0.5mm, Features="Automotive AEC-Q200", Height=0.016inch, Length=1mm, Military Standard=Not, Number of Pins=2, Number of Terminations=2, Packaging="Tape and Reel", Power Rating=63mW, Termination=SMD/SMT, Weight=2.3E-05oz, Width=0.5mm
U1: "IC EEPROM 512KBIT 1MHZ 8SOIC", Case/Package=SOIC, Frequency=100kHz, Manufacturer="ON Semiconductor", Max Frequency=400kHz, Max Operating Temperature=85°C, Max Supply Voltage=5.5V, Min Operating Temperature=-40°C, Min Supply Voltage=1.8V, Nominal Supply Current=2.5mA, Operating Supply Voltage=5V, Package Quantity=1, Supplier Part Number 1=863-CAT24C512WI-GT3, Access Time=3500ns, Access Time-Max=900ns, Category=EEPROM, ComponentLink1Description=https://datasheet.ciiva.com/22618/1674429-22618480.pdf?src-supplier=Element14, ComponentLink1URL=https://datasheet.ciiva.com/22618/1674429-22618480.pdf?src-supplier=Element14, ComponentLink2Description=https://datasheet.ciiva.com/25627/0900766b810de298-25627756.pdf?src-supplier=RSComponents, ComponentLink2URL=https://datasheet.ciiva.com/25627/0900766b810de298-25627756.pdf?src-supplier=RSComponents, Contact Plating=Gold, Density=512Kb, Halogen Free="Halogen Free", Height=1.5mm, Interface=I2C,Serial,2-Wire, Lead Free="Lead Free", Length=5mm, Manufacturer Part Number=CAT24C512WI-GT3, Memory Size=512Kb, Memory Type=EEPROM, Mount="Surface Mount", Number of Pins=8, Number of Words=64000, Organization=32KX8, Packaging="Tape and Reel", Pricing 1="1=0.68000, 10=0.62300, 50=0.61200, 100=0.54700, 1000=0.51600, 10000=0.50800 (USD)", Radiation Hardening=No, REACH SVHC="No SVHC", RoHS=Yes, RoHS Compliant=Yes, Series=-, Stock 1=254725, Supplier 1=Mouser, Supply Current=2.5mA, Supply Voltage-Nom=5.5V, Width=4mm, Write Cycle Time-Max (tWC)=5ms, Write Protection=YES
U2: "Advanced Bluetooth 5, Thread and Zigbee multiprotocol SoC", Manufacturer="Nordic Semiconductor", Supplier Part Number 1=949-NRF52840-CKAA-R7, Category="RF Receivers, Transceivers", Manufacturer Part Number=NRF52840-CKAA-R7, Pricing 1="1=6.69000, 10=6.04000, 50=5.76000, 100=5.00000, 1000=5.00000, 10000=5.00000 (USD)", RoHS=Yes, Supplier 1=Mouser
U3: "Linear Voltage Regulator IC Positive Fixed 1 Output 3.3V 150mA SOT-23-5", Case/Package=SOT-23-5, Dropout Voltage=960mV, Manufacturer="Texas Instruments", Max Input Voltage=30V, Max Operating Temperature=125°C, Max Output Current=150mA, Min Current Limit=200mA, Min Input Voltage=2.7V, Min Operating Temperature=-40°C, Nominal Output Voltage=3.3V, Output Voltage Accuracy=1%, Package Quantity=1, Power Supply Rejection Ratio (PSRR)=80dB, Quiescent Current=1uA, Supplier Part Number 1=296-35483-1-ND, Accuracy=2%, Category="Voltage Regulators - Linear", ComponentLink1Description=https://datasheet.ciiva.com/6580/tps70933-6580912.pdf?src-supplier=Digi-Key, ComponentLink1URL=https://datasheet.ciiva.com/6580/tps70933-6580912.pdf?src-supplier=Digi-Key, ComponentLink2Description=https://datasheet.ciiva.com/6580/tps709-6580908.pdf?src-supplier=Digi-Key, ComponentLink2URL=https://datasheet.ciiva.com/6580/tps709-6580908.pdf?src-supplier=Digi-Key, ComponentLink3Description=https://datasheet.ciiva.com/6580/tps709-6580911.pdf?src-supplier=Digi-Key, ComponentLink3URL=https://datasheet.ciiva.com/6580/tps709-6580911.pdf?src-supplier=Digi-Key, Lead Free="Lead Free", Manufacturer Part Number=TPS70933DBVR, Mount="Surface Mount", Number Of Outputs=1, Number of Pins=5, Number of Regulators=1, Output Current=150mA, Output Type=Fixed, Output Voltage=3.3V, Packaging="Tape and Reel", Polarity=Positive, Pricing 1="1=1.37000, 10=1.22300, 25=1.16040, 100=0.95330, 250=0.89108, 500=0.78748, 1000=0.62560 (USD)", Radiation Hardening=No, REACH SVHC="No SVHC", RoHS=Yes, RoHS Compliant=Yes, Series=-, Stock 1=84982, Supplier 1=Digi-Key
U4: "LOW SIDE REV BIAS POLAR PROTECT", Breakdown Voltage=14.5V, Clamping Voltage=15V, Current=8A, Manufacturer="ON Semiconductor / Fairchild", Max Operating Temperature=125°C, Max Power Dissipation=2.4W, Min Operating Temperature=-55°C, Operating Supply Voltage=8V, Package Quantity=3000, Supplier Part Number 1=512-FR015L3EZ, Voltage=1.3V, Category="EMI / RFI Components", ComponentLink1Description=https://datasheet.ciiva.com/13084/fr015l3ez-113107-13084211.pdf?src-supplier=Mouser, ComponentLink1URL=https://datasheet.ciiva.com/13084/fr015l3ez-113107-13084211.pdf?src-supplier=Mouser, ComponentLink2Description=https://datasheet.ciiva.com/6702/fr015l3ez-6702465.pdf?src-supplier=Digi-Key, ComponentLink2URL=https://datasheet.ciiva.com/6702/fr015l3ez-6702465.pdf?src-supplier=Digi-Key, Height=0.725mm, Lead Free="Lead Free", Length=2mm, Manufacturer Part Number=FR015L3EZ, Mount="Surface Mount", Number of Channels=1, Number of Circuits=1, Number Of Outputs=1, Number of Pins=6, Packaging="Tape and Reel", Peak Pulse Power=2.4W, Polarity=Unidirectional, Pricing 1="1=0.71000, 10=0.62700, 50=0.62700, 100=0.48000, 1000=0.30400, 10000=0.26700 (USD)", RoHS=Yes, RoHS Compliant=Yes, Series=FR015, Stock 1=21380, Supplier 1=Mouser, Termination=SMD/SMT, Weight=0.03g, Width=2mm, Working Voltage=8V
U5: "LDO Regulator Pos 3.3V 1A Automotive 8-Pin HTSOP-J EP T/R", Dropout Voltage=600mV, Input Bias Current=600uA, Manufacturer=Rohm, Max Input Voltage=8V, Max Operating Temperature=105°C, Max Output Current=1A, Max Power Dissipation=2.11W, Min Input Voltage=4.5V, Min Operating Temperature=-40°C, Nominal Output Voltage=3.3V, Package Quantity=1, Supplier Part Number 1=BD33HC0MEFJ-ME2CT-ND, Category="Voltage Regulators - Linear", ComponentLink1Description=https://datasheet.ciiva.com/29568/bdxxhc0mefj-m-e-29568538.pdf?src-supplier=Digi-Key, ComponentLink1URL=https://datasheet.ciiva.com/29568/bdxxhc0mefj-m-e-29568538.pdf?src-supplier=Digi-Key, ComponentLink2Description=https://datasheet.ciiva.com/29568/bdxxhc0mefj-m-e-29568539.pdf?src-supplier=Digi-Key, ComponentLink2URL=https://datasheet.ciiva.com/29568/bdxxhc0mefj-m-e-29568539.pdf?src-supplier=Digi-Key, ComponentLink3Description=https://datasheet.ciiva.com/29569/bdxxhc0mefj-m-e-29569161.pdf?src-supplier=Digi-Key, ComponentLink3URL=https://datasheet.ciiva.com/29569/bdxxhc0mefj-m-e-29569161.pdf?src-supplier=Digi-Key, ComponentLink4Description=https://datasheet.ciiva.com/48677/bdxxhc0mefj-m-e-48677678.pdf?src-supplier=Avnet, ComponentLink4URL=https://datasheet.ciiva.com/48677/bdxxhc0mefj-m-e-48677678.pdf?src-supplier=Avnet, Manufacturer Part Number=BD33HC0MEFJ-ME2, Mount="Surface Mount", Number Of Outputs=1, Number of Pins=8, Number of Regulators=1, Output Current=1A, Output Type=Fixed, Output Voltage=3.3V, Packaging="Tape and Reel", Pricing 1="1=1.50000, 10=1.34500, 25=1.27640, 100=1.04830, 250=0.97996, 500=0.86602, 1000=0.68370 (USD)", REACH SVHC=Unknown, RoHS=Yes, RoHS Compliant=Yes, Stock 1=1946, Supplier 1=Digi-Key
U9: "PCF8523 Series 5.5 V 1 Mbps I2C Interface Real Time Clock / Calendar - HVSON-8", Case/Package=HVSON, Manufacturer="NXP Semiconductors", Max Operating Temperature=85°C, Max Supply Voltage=5.5V, Min Operating Temperature=-40°C, Min Supply Voltage=1.2V, Package Quantity=6000, Supplier Part Number 1=568-6648-1-ND, Temperature Grade=INDUSTRIAL, Category="Real Time Clocks", ComponentLink1Description=https://datasheet.ciiva.com/1238/pcf8523-1238777.pdf?src-supplier=Digi-Key, ComponentLink1URL=https://datasheet.ciiva.com/1238/pcf8523-1238777.pdf?src-supplier=Digi-Key, ComponentLink2Description=https://datasheet.ciiva.com/1238/pcf8523-1238778.pdf?src-supplier=Digi-Key, ComponentLink2URL=https://datasheet.ciiva.com/1238/pcf8523-1238778.pdf?src-supplier=Digi-Key, ComponentLink3Description=https://datasheet.ciiva.com/1238/pcf8523-1238779.pdf?src-supplier=Digi-Key, ComponentLink3URL=https://datasheet.ciiva.com/1238/pcf8523-1238779.pdf?src-supplier=Digi-Key, ComponentLink4Description=https://datasheet.ciiva.com/8144/pcf8523-8144533.pdf?src-supplier=Avnet, ComponentLink4URL=https://datasheet.ciiva.com/8144/pcf8523-8144533.pdf?src-supplier=Avnet, ComponentLink5Description=https://datasheet.ciiva.com/16355/pcf8523-16355845.pdf?src-supplier=Future+Electronics, ComponentLink5URL=https://datasheet.ciiva.com/16355/pcf8523-16355845.pdf?src-supplier=Future+Electronics, Interface=I2C, Lead Free="Lead Free", Logic Function=Clock, Manufacturer Part Number=PCF8523TK/1,118, Mount="Surface Mount", Number of Pins=8, Packaging="Tape and Reel", Pricing 1="1=1.91000, 10=1.71600, 25=1.61920, 100=1.37950, 250=1.29528, 500=1.13336, 1000=1.02389 (USD)", Radiation Hardening=No, REACH SVHC="No SVHC", RoHS=Yes, RoHS Compliant=Yes, Stock 1=85182, Supplier 1=Digi-Key, Supply Voltage-Nom=5.5V, Time Format=HH:MM:SS
Y1: library part XTAL_ECS-320-8-37BQ-CKY-TR, "Crystal 32MHz 8pF ±10ppm ±10ppm 4-Pin Miniature CSMD T/R", Manufacturer="ECS International", Manufacturer Part Number=ECS-320-8-37BQ-CKY-TR, Supplier Part Number 1=50-ECS-320-8-37BQ-CKY-CT-ND, Pricing 1="1=0.57000, 10=0.47700, 50=0.42960, 100=0.38180, 500=0.36270 (USD)", RoHS=No, Stock 1=8978, Supplier 1=Digi-Key
Y2: library part XTAL_ABS07-32.768KHZ-9-1-T, "ABS07 Series 3.2 x 1.5 x 0.9 mm 32.768 KHz ±10ppm 9 pF -40 to 85°C Crystal SMT", Case/Package=SMD/SMT, ESR (Equivalent Series Resistance)=70kR, Frequency Tolerance=10ppm, Load Capacitance=9pF, Manufacturer=Abracon, Manufacturer Part Number=ABS07-32.768KHZ-9-1-T, Max Operating Temperature=85°C, Min Operating Temperature=-40°C, Operating Frequency="32.768 kHz", Package Quantity=3000, Supplier Part Number 1=815-ABS07-32.7K9-1-T, Category=Crystals, ComponentLink1Description=https://datasheet.ciiva.com/12389/abs07-11028-12389874.pdf?src-supplier=Mouser, ComponentLink1URL=https://datasheet.ciiva.com/12389/abs07-11028-12389874.pdf?src-supplier=Mouser, Frequency=32.768kHz, Height=0.035inch, Lead Free="Lead Free", Length=0.126inch, Mount="Surface Mount", Packaging="Tape and Reel", Pricing 1="1=1.50000, 10=1.44000, 50=1.40000, 100=1.20000, 1000=0.98500, 10000=0.90100 (USD)", RoHS=Yes, RoHS Compliant=Yes, Series=ABS07, Stock 1=54228, Supplier 1=Mouser, Termination=SMD/SMT, Tolerance=10ppm, Width=0.061inch
Y4: library part XTAL_ABS07-32.768KHZ-7-T, "Crystal 0.032768MHz ±20ppm (Tol) 7pF Flexural 70000Ohm 2-Pin CSMD T/R", Case/Package=CSMD, ESR (Equivalent Series Resistance)=70kR, Frequency Stability=20ppm, Insulation Resistance=500MR, Load Capacitance=7pF, Manufacturer=Abracon, Manufacturer Part Number=ABS07-32.768KHZ-7-T, Max Operating Temperature=85°C, Min Operating Temperature=-40°C, Operating Frequency="32.768 kHz", Package Quantity=3000, Supplier Part Number 1=535-9543-1-ND, Category=Crystals, ComponentLink1Description=https://datasheet.ciiva.com/3174/abs07-3174144.pdf?src-supplier=Avnet, ComponentLink1URL=https://datasheet.ciiva.com/3174/abs07-3174144.pdf?src-supplier=Avnet, ComponentLink2Description=https://datasheet.ciiva.com/855/abs07-855945.pdf?src-supplier=Digi-Key, ComponentLink2URL=https://datasheet.ciiva.com/855/abs07-855945.pdf?src-supplier=Digi-Key, ComponentLink3Description=https://datasheet.ciiva.com/855/abs07-855946.pdf?src-supplier=Digi-Key, ComponentLink3URL=https://datasheet.ciiva.com/855/abs07-855946.pdf?src-supplier=Digi-Key, ComponentLink4Description=https://datasheet.ciiva.com/855/abs07-855947.pdf?src-supplier=Digi-Key, ComponentLink4URL=https://datasheet.ciiva.com/855/abs07-855947.pdf?src-supplier=Digi-Key, ComponentLink5Description=https://datasheet.ciiva.com/8344/abs07-8344589.pdf?src-supplier=Avnet, ComponentLink5URL=https://datasheet.ciiva.com/8344/abs07-8344589.pdf?src-supplier=Avnet, ComponentLink6Description=https://datasheet.ciiva.com/16199/abs07-16199467.pdf?src-supplier=Future+Electronics, ComponentLink6URL=https://datasheet.ciiva.com/16199/abs07-16199467.pdf?src-supplier=Future+Electronics, Depth=1.5mm, Frequency=32.768kHz, Frequency Tolerance=20ppm, Height=0.035inch, Lead Free="Lead Free", Length=3.2mm, Mount="Surface Mount", Number of Pins=2, Packaging="Tape and Reel", Pricing 1="1=1.50000, 10=1.43600, 50=1.40240, 100=1.20200, 500=1.16864, 1000=0.98500 (USD)", Radiation Hardening=No, REACH SVHC="No SVHC", RoHS=Yes, Series=ABS07, Series Resistance=70kR, Stock 1=994435, Supplier 1=Digi-Key, Termination=SMD/SMT, Tolerance=20ppm, Width=1.5mm

## Via types
v1: diameter 18, hole 10, Top Layer to Bottom Layer, tented both sides, 73 vias
v2: diameter 16, hole 8, Top Layer to Bottom Layer, tented both sides, 72 vias
v3: diameter 8, hole 4, Top Layer to L2, tented both sides, 49 vias
v4: diameter 8, hole 4, L2 to L3, tented both sides, 32 vias

## Nets (pads, with @x,y where several pads share a name; then routed paths per layer and width w, separated by ;. In a path a pad name is that pad's centre, name@x,y a point inside that pad or via, vN(x,y) a via of type N, cw(c..) or ccw(c..) an arc to the next point about the centre after c; other vN are vias at no path point)
ALARM: U2.G9 U9.7 | length 346.1
  L2 w4: v3(5745.1,1636.21) 5769.94,1661.04 v2(5816.88,1661.04)
  Bottom Layer w4: v2(5816.88,1661.04) 5780,1624.17 5780,1580 5805,1555 5835,1555 5850,1540 5850,1503.23 5863.82,1489.4 5883.51,1489.4 U9.7
ANT: C11.2 L1.1 | length 990.3
  Top Layer w8: L1.1@5713.52,1383.45 L1.1@5714.04,1383.98
  Top Layer w20: 5713.52,1289.03 C11.2 L1.1@5713.52,1383.45
  Top Layer w50: 5714.47,1288.39 5714.47,1103.78 5775.86,1042.39 ; 5774.45,1043.82 6398.13,1043.82
GND: C1.2 C2.2 C3.2 C4.2 C5.2 C6.1 C7.1 C8.2 C9.2 C10.2 C11.1 C12.1 C13.1 C14.1 C15.1 C16.1 C17.1 C18.2 J1.3 J1.4 J1.5 J1.8 J1.9 Q2.2 R5.1 R6.1 U1.1 U1.2 U1.3 U1.4 U1.7 U2.B7 U2.C1 U2.C4 U2.D3 U2.D4 U2.D5 U2.D6 U2.D7 U2.D8 U2.E4 U2.E5 U2.E6 U2.E7 U2.E8 U2.F4 U2.F5 U2.F6 U2.F7 U2.F8 U2.G4 U2.G5 U2.G6 U2.G7 U2.G8 U2.J9 U2.K10 U3.2 U4.4 U4.7 U5.3 U5.9 U9.4 U9.9 Y1.2 Y1.4 | length 853.9
  Top Layer w10: C10.2 5668.41,1735.5 ; 5668.44,1735.5 5678.41,1725.53 ; 5678.41,1725.49 5686.88,1717.03 C5.2 5725.1,1692.03 C15.1
  Top Layer w15: C3.2@5512.62,1566.18 5537.39,1541.41 C2.2 ; Y1.4 5535.1,1368.37 C1.2 ; U5.9@5940.1,1456.09 U5.9@5965.1,1431.09 ; U5.3@5940.1,1536.09 U5.3@5940.1,1556.09 ; U5.9@5943.68,1475.78 U5.3 ; U1.7 5993.68,1633.88 6002.47,1625.1 6002.84,1625.1 6003.02,1624.92 C17.1@6003.02,1617.74 ; C6.1 6165.1,1738.81 R6.1 6196.4,1865.03 Q2.2 ; U4.7@6275.73,1578.49 6275.73,1541.09 U4.4 ; U3.2 6339.14,1729.8 6384.38,1729.8 C7.1 6462.39,1728.81
  Bottom Layer w15: U9.4 6034.63,1422.76 6035,1422.38 6035,1395.81
  other v1: 5280,1360 5360,1360 5440,1360 5600,1360 5840,1360 5920,1360 6160,1360 6240,1360 6320,1360 6400,1360 6480,1360 6560,1360 5320,1440 5400,1440 5480,1440 6280,1440 6360,1440 5280,1520 5360,1520 5440,1520 5320,1600 5280,1680 5360,1680 6480,1680 6560,1680 5400,1760 5960,1760 6040,1760 6120,1760 6440,1760 6520,1760 6600,1760 5280,1840 5600,1840 6160,1840 6480,1840 6560,1840 5400,1920 5480,1920 5560,1920 6120,1920 6280,1920 6360,1920 6440,1920 6520,1920 6600,1920 5280,2000 6080,2000 6160,2000 6240,2000 6320,2000 6400,2000 6480,2000 6560,2000 5480,2080 5880,2080 6040,2080 6120,2080 6200,2080 6280,2080 6360,2080 6440,2080 6520,2080 6600,2080
  other v2: 5757.02,1330 5777.02,1340 5652.98,1341.59 5757.02,1350 5777.02,1360 5652.98,1361.59 5757.02,1370 5672.98,1371.59 5777.02,1380 5652.98,1381.59 5757.02,1390 5672.98,1391.59 5777.02,1400 5652.98,1401.59 5757.02,1410 5672.98,1411.59 5777.02,1420 5652.98,1421.59 5757.02,1430 5672.98,1431.59 5777.02,1440 5652.98,1441.59 5757.02,1450 5672.98,1451.59 5777.02,1460 5652.98,1461.59 5757.02,1470 5652.98,1481.59 5609.57,1576.87 5591.02,1669.73 5713.55,1811.71
  other v3: 5703.77,1553.53 5689.99,1567.31 5703.77,1567.31 5717.54,1567.31 5731.32,1567.31 5745.1,1567.31 5703.77,1581.09 5717.54,1581.09 5731.32,1581.09 5745.1,1581.09 5703.77,1594.87 5717.54,1594.87 5731.32,1594.87 5745.1,1594.87 5676.21,1608.65 5703.77,1608.65 5717.54,1608.65 5731.32,1608.65 5745.1,1608.65 5703.77,1622.43 5717.54,1622.43 5731.32,1622.43 5745.1,1622.43 5772.66,1636.21
  other v4: 5703.77,1553.53 5689.99,1567.31 5703.77,1567.31 5717.54,1567.31 5731.32,1567.31 5745.1,1567.31 5703.77,1581.09 5717.54,1581.09 5731.32,1581.09 5745.1,1581.09 5703.77,1594.87 5717.54,1594.87 5731.32,1594.87 5745.1,1594.87 5703.77,1608.65 5717.54,1608.65 5731.32,1608.65 5745.1,1608.65 5703.77,1622.43 5717.54,1622.43 5731.32,1622.43 5745.1,1622.43
IO2: R15.1 U2.C8 | length 477.4
  Top Layer w6: v2(5698.53,1862.4) 5713.15,1877.02 5730.14,1877.02 R15.1
  L3 w4: v2(5552.18,1669.88) 5566.03,1683.73 5596.82,1683.73 5605.02,1675.53 5605.02,1664.27 5632.64,1636.65 5655.48,1636.65 5669.7,1622.43 v3(5689.99,1622.43)
  L4 w4: v2(5552.18,1669.88) 5552.18,1706.51 5653.08,1807.41 5653.08,1835.03 5680.44,1862.4 v2(5698.53,1862.4)
  other v4: 5689.99,1622.43
IO3: R17.1 U2.C9 | length 456.3
  Top Layer w6: v2(5799.42,1904.89) 5801.19,1903.12 5801.19,1894.62 5813.05,1882.76 5824.91,1882.76 R17.1
  L2 w4: v3(5689.99,1636.21) 5689.99,1744.45 5649.98,1784.45 5649.98,1860.67 5681.64,1892.32 5746.51,1892.32 5748.85,1894.67 5748.85,1894.97 5758.77,1904.89 v2(5799.42,1904.89)
IO4: R19.1 U2.D9 | length 664.5
  Top Layer w6: v2@5822.04,1845.97 5844.97,1845.97 5865.85,1866.85 5865.85,1914.09 5886.73,1934.97 5945.76,1934.97 5972.75,1961.96 6039.09,1961.96 R19.1
  L2 w4: v3(5703.77,1636.21) 5703.77,1748.03 5666,1785.8 5666,1823.43 5689.22,1846.65 v2(5823.06,1846.65)
IO5: R8.2 U2.E2 | length 617.5
  L2 w4: v2@5345.42,1819.3 5343.67,1817.54 5343.67,1723.59 5538.43,1528.82 5706.61,1528.82 v3(5717.54,1539.75)
  Bottom Layer w6: R8.2 5334.46,1828.37 v2(5343.67,1819.17)
IO6: R10.2 U2.E3 | length 525.1
  L3 w4: v2@5422.36,1818.94 5422.36,1733.48 5612.31,1543.53 5707.91,1543.53 5717.54,1553.17 v4(5717.54,1553.53)
  Bottom Layer w6: v2@5425,1820 5434.93,1829.93 R10.2
  other v2: 5422.76,1819.17
  other v3: 5717.54,1553.53
IO7: R12.2 U2.E9 | length 370.2
  L2 w4: v2(5680,1815) 5680,1789.08 5717.74,1751.35 v3@5717.74,1636.58
  Bottom Layer w6: R12.2 5592.04,1815 v2(5680,1815)
  other v3: 5717.54,1636.21
IO8: R14.2 U2.K2 | length 777.6
  L2 w6: v2(5665.3,1901.51) 5688,1924.21 5859.14,1924.21 5922.47,1860.87 5922.47,1596.67 5844.69,1518.89 5807.3,1518.89 v3(5786.44,1539.75)
  Bottom Layer w6: R14.2 5639.01,1884.74 5648.53,1884.74 v2(5665.3,1901.51)
IO9: R16.2 U2.K3 | length 552.4
  L2 w6: v2(5759.52,1867.66) 5760.56,1868.7 5874.8,1868.7 5907.78,1835.72 5907.78,1633.84 5827.48,1553.53 v3(5786.44,1553.53)
  Bottom Layer w6: R16.2 5738.75,1868.52 5741.41,1868.52 5742.27,1867.66 v2(5759.52,1867.66)
IO10: R18.2 U2.K7 | length 364.4
  L2 w4: v3(5786.44,1608.65) 5812.9,1635.11 5849.72,1635.11 5884.29,1669.67 5884.29,1827.41 v2(5885.66,1828.78)
  Bottom Layer w6: R18.2@5835.47,1877.38 5856.28,1877.38 5885.66,1847.99 v2(5885.66,1828.78)
IO11: R20.2 U2.F9 | length 642.1
  L2 w4: v2@5700.46,1789.63 5731.32,1758.77 v3(5731.32,1636.21)
  L4 w4: v2(5700,1790) 5698.41,1791.59 5698.41,1836.64 5750.76,1888.99 5949.93,1888.99 v2(5994.89,1933.95)
  Bottom Layer w6: R20.2 5933.97,1878.5 5950.1,1878.5 5992.98,1921.37 5992.98,1932.04 v2(5994.89,1933.95)
MISO: R11.1 U2.C6 | length 418.5
  Top Layer w6: v2(5516.18,1819.17) 5517.98,1819.17 5530.73,1831.92 5530.73,1875.24 R11.1
  L3 w4: v2@5516.18,1820.05 5516.18,1674.11 5564.05,1626.24 5608.04,1626.24 5639.41,1594.87 v3(5689.99,1594.87)
  other v4: 5689.99,1594.87
MOSI: R9.1 U2.C5 | length 459.2
  Top Layer w6: R9.1 5435.32,1875.35 5435.32,1830 v2(5446.15,1819.17)
  L3 w4: v2@5446.15,1818.52 5446.15,1724.29 5579.44,1591 5628.4,1591 5638.31,1581.09 v4(5689.99,1581.09)
  other v3: 5689.99,1581.09
NetC1_1: C1.1 U2.A1 Y1.1 | length 197
  Top Layer w8: C1.1 5572.82,1414.32 5587.21,1428.7 5587.21,1431.53 5607.47,1451.79 5607.47,1471.01 U2.A1
NetC2_1: C2.1 U2.A2 Y1.3 | length 162.5
  Top Layer w8: Y1.3@5535.2,1471.18 5535.2,1473.15 5567.13,1505.09 5567.13,1514.7 C2.1@5572.82,1520.39 ; C2.1 5573.43,1520.48 5611.2,1520.48 5630.47,1539.75 U2.A2@5662.27,1539.75
NetC3_1: C3.1 U2.A8 U2.C2 | length 461
  Top Layer w4: v2(5479.06,1643.67) 5496.87,1625.85 5510.38,1625.85 C3.1 5518.15,1625.85 5531.57,1625.85 ; 5531.57,1626.09 5624.14,1626.09 5634.11,1626.09 5634.2,1626 5645.8,1626 5645.89,1626.09 5657.91,1626.09 5661.57,1622.43 U2.A8
  L2 w4: v2(5479.06,1643.67) 5479.06,1624.08 5563.38,1539.75 v3(5689.99,1539.75)
NetC4_1: C4.1 U2.A10 | length 48.9
  Top Layer w4: C4.1@5613.51,1649.99 U2.A10
NetC9_1: C9.1 U2.B9 Y2.2 | length 385.9
  Top Layer w4: v2(5444.33,1682.75) 5445.1,1683.52 C9.1@5445.1,1708.37 ; C9.1 C9.1@5445.1,1708.37 ; Y2.2 5485.1,1721.09 5472.39,1708.37 C9.1@5445.1,1708.37
  L2 w4: v2(5444.33,1682.75) 5475.46,1713.88 5627.54,1713.88 5676.21,1665.21 v3(5676.21,1636.21)
NetC10_1: C10.1 U2.B10 Y2.1 | length 138
  Top Layer w4: Y2.1@5594.32,1721.09 5620.1,1721.09 5630.1,1711.09 5652.82,1711.09 C10.1 5676.21,1692.27 U2.B10
NetC12_2: C12.2 L1.2 U2.E1 | length 93
  Top Layer w10: C12.2@5717.54,1480.88 U2.E1
  Top Layer w20: L1.2@5714.47,1435.48 5716.28,1437.29 C12.2
NetC18_1: C18.1 U2.F2 | length 137.7
  Top Layer w4: v2(5805.1,1466.09) 5808.23,1469.22 C18.1
  L2 w4: v3(5731.32,1539.75) 5731.32,1538.67 5733.32,1536.67 5733.32,1535.63 5758.91,1510.04 5771.15,1510.04 5786.68,1494.51 5786.68,1484.51 v2(5805.1,1466.09)
NetJ2_2: J2.2 U4.1 U4.2 U4.5 U4.6 | length 370.1
  Top Layer w15: U4.2 U4.1 6236.36,1607.35 6245.1,1616.09 6305.1,1616.09 6315.1,1606.09 U4.6 U4.5 6344.51,1566.68 6350.1,1561.09 6350.1,1501.09 6323.73,1474.71 v1(6298.73,1474.71)
  Bottom Layer w15: v1(6298.73,1474.71) 6298.73,1475.52 6302.93,1479.73 6302.93,1510.82 J2.2
NetJ3_1: J3.1 R7.2 | length 74.9
  Top Layer w6: J3.1 5333.28,1992.86 R7.2
NetJ3_2: J3.2 R8.1 | length 216.1
  Bottom Layer w6: J3.2 5383.68,2042.46 5383.68,1967.88 R8.1
NetJ3_3: J3.3 R9.2 | length 77.2
  Top Layer w4: J3.3 J3.3@5435.82,1990.32 ; R9.2@5435.82,1917.8 R9.2
  Top Layer w6: R9.2@5435.82,1917.8 J3.3@5435.82,1990.32
NetJ3_4: J3.4 R10.1 | length 218.4
  Bottom Layer w6: J3.4 5481.3,2044.84 5481.3,1974.48 5442.12,1935.3 5442.12,1921.38 5436.03,1915.29 R10.1@5434.93,1916.38
NetJ3_5: J3.5 R11.2 | length 74.8
  Top Layer w6: R11.2@5532.81,1918.55 J3.5
NetJ3_6: J3.6 R12.1 | length 221.4
  Bottom Layer w6: R12.1@5531.1,1918.28 5587.95,1975.12 5587.95,2038.19 J3.6
NetJ3_7: J3.7 R13.2 | length 74
  Top Layer w6: J3.7 5632.81,1920.34 R13.2
NetJ3_8: J3.8 R14.1 | length 215.2
  Bottom Layer w6: R14.1 5679.41,1966.48 5680.41,1966.48 5680.41,2045.73 J3.8
NetJ3_9: J3.9 R15.2 | length 75.6
  Top Layer w6: R15.2 5730.45,1990.97 J3.9
NetJ3_10: J3.10 R16.1 | length 217.8
  Bottom Layer w6: R16.1 5783.41,1972.14 5783.41,2042.73 J3.10
NetJ3_11: J3.11 R17.2 | length 75.7
  Top Layer w6: R17.2 5832.81,1921.13 J3.11
NetJ3_12: J3.12 R18.1 | length 216.4
  Bottom Layer w6: R18.1 5841.62,1927.48 5841.62,1928.51 5883.21,1970.1 5883.21,2042.93 J3.12
NetJ3_13: J3.13 R19.2 | length 115.6
  Top Layer w6: J3.13 5948.24,1993.33 5963.33,2008.42 6037.1,2008.42 R19.2
NetJ3_14: J3.14 R20.1 | length 212
  Bottom Layer w6: R20.1 5977.93,1963.79 5977.93,2048.21 J3.14
NetQ1_1: Q1.1 R1.1 R2.2 | length 99.5
  Top Layer w15: Q1.1 6365.1,1883.53 6365.1,1846.09 6356.17,1837.15 R2.2 R1.1
NetQ1_3: Q1.3 R4.1 | length 988.8
  Top Layer w10: R4.1@5585.54,1579.34 5585.93,1579.34 5603.85,1597.25 5603.85,1603.85 v2(5605,1605)
  Top Layer w15: v2(6364.53,1958.29) Q1.3
  Bottom Layer w10: v2(5605,1605) 5605,1619.3 5785.7,1800 5892.65,1800 5949.3,1856.65 6131.77,1856.65 6143.26,1868.14 6274.38,1868.14 v2(6364.53,1958.29)
NetQ2_1: Q2.1 R3.2 R6.2 | length 111.7
  Top Layer w15: R3.2@6126.17,1887.15 R6.2 6180.1,1887.15 6194.92,1887.17 6224.19,1916.44 Q2.1
NetQ2_3: Q2.3 R2.1 | length 69.3
  Top Layer w15: Q2.3 6300.1,1851.09 6325.1,1826.09 R2.1
NetU9_1: U9.1 Y4.2 | length 84.3
  Bottom Layer w10: U9.1 6067.28,1517.24 Y4.2@6102.52,1552.48
NetU9_2: U9.2 Y4.1 | length 77.8
  Bottom Layer w10: U9.2 6074.29,1485.75 Y4.1@6100.02,1460.02
nRESET: J1.10 U2.K6 | length 906
  Top Layer w4: U2.K6 5787.05,1594.87 5797.09,1604.91 5830.09,1604.91 v2(5840,1595)
  Top Layer w6: v1(6530,1415) J1.10
  L3 w4: v2(5840,1595) 5857.13,1595 6007.13,1445 6085,1445 6113.91,1416.09 v1@6530,1416.09
NRF_AP_READY: U2.A6
NRF_PSM_IND: U2.B4
NRF_PWRKEY: U2.A3
NRF_RESET_N: U2.A4
NRF_RXD: U2.F10
NRF_STATUS: U2.A7
NRF_TXD: U2.G10
SCK: R7.1 U2.B5 | length 631.8
  Top Layer w6: v2(5318.25,1819.17) 5333.28,1834.2 R7.1
  L2 w4: v2@5629.22,1568.44 5652.67,1568.44 5665.32,1581.09 v3(5676.21,1581.09)
  L4 w4: v2(5318.25,1819.17) 5318.25,1663.39 5422.71,1558.93 5617.88,1558.93 5628.55,1569.6 v2(5630,1569.6)
SCL: U1.6 U2.G2 U9.6 | length 399.8
  Top Layer w6: v2(5810.1,1499.09) 5842.72,1531.71 5842.72,1556.06 5935.18,1648.53 5935.18,1661.17 U1.6@5940.1,1666.09
  L3 w4: v3(5745.1,1539.75) 5745.1,1539.39 5762.74,1521.75 5771.89,1521.75 5792.55,1501.09 5805.1,1501.09 5806.6,1502.59 v2(5810.1,1499.09)
  Bottom Layer w4: v2(5810.1,1499.09) 5835,1474.19 5854.94,1454.25 U9.6
  other v4: 5745.1,1539.75
SDA: U1.5 U2.G3 U9.5 | length 423.3
  Top Layer w6: v2(5821.28,1535.09) 5830,1543.83 5830,1561.84 5890.1,1621.95 U1.5@5890.1,1666.09
  L3 w4: v3(5745.1,1553.53) 5781.66,1553.53 5800.1,1535.09 v2(5821.28,1535.09)
  Bottom Layer w4: v2(5821.28,1535.09) 5810.09,1535.09 5795,1520 5795,1494.39 5809.3,1480.09 5814.91,1480.09 5866.37,1428.63 5881.29,1428.63 U9.5
  other v4: 5745.1,1553.53
SSL: R13.1 U2.C7 | length 440
  Top Layer w4: R13.1@5632.41,1877.21 R13.1
  Top Layer w6: v2(5632.41,1849.18) R13.1@5632.41,1877.21
  L3 w4: v2(5574.32,1649.03) 5602.53,1649.03 5622.91,1628.65 5644.13,1628.65 5664.35,1608.43 v4@5690.17,1608.43
  L4 w4: v2(5574.32,1649.03) 5546.76,1649.03 5529.14,1666.64 5529.14,1722.93 5632.41,1826.2 v2(5632.41,1849.18)
  other v3: 5689.99,1608.65
  other v4: 5689.99,1608.65
SWDCLK: J1.6 U2.H2 | length 1182
  Top Layer w6: v1(6530,1515) J1.6@6584.4,1515
  L3 w4: v3(5758.88,1539.75) 5758.88,1539.39 5768.52,1529.75 5777.26,1529.75 5793.92,1513.09 5911.79,1513.09 5999.88,1425 6075,1425 6109.39,1390.61 6484.39,1390.61 6545,1330 6575,1330 6600,1355 6600,1425 6530,1495 v1(6530,1515)
  other v4: 5758.88,1539.75
SWDIO: J1.2 U2.J2 | length 1209.5
  Top Layer w6: v1(6530,1615) J1.2
  L3 w4: v4(5772.66,1539.75) 5782.22,1539.75 5800.88,1521.09 5915.1,1521.09 6001.19,1435 6080,1435 6115,1400 6500,1400 6520,1380 6545,1380 6560,1395 6560,1420 6485,1495 6485,1570 v1(6530,1615)
  other v3: 5772.66,1539.75
TRIGGERVREAD: R3.1 U2.F3 | length 743.3
  Top Layer w15: R3.1 6125.1,1831.09 v2(6130.1,1826.09)
  L3 w4: v4(5731.32,1553.53) 5732.09,1552.77 5732.09,1549.94 5732.51,1549.52 5732.51,1537.94 5765.4,1505.06 5765.4,1496.53 5766.02,1495.9 5766.02,1495.21 5770.02,1491.21 v2(5770.02,1487.96)
  Bottom Layer w6: v2(5770.02,1487.96) 5770.02,1490.67 5764.42,1496.28 5764.42,1498.67 5741.34,1521.75 5741.34,1624.45 5942.97,1826.09 v2(6130.1,1826.09)
  other v3: 5731.32,1553.53
VBAT: C7.2 C16.2 J1.7 J2.1 Q1.2 R1.2 U3.1 U3.3 U4.3 U5.8 U9.3 | length 1922.8
  Top Layer w15: U5.8 6043.68,1345.6 6045.68,1343.6 6087.61,1343.6 6218.73,1474.71 6218.73,1523.45 U4.3 ; U3.3 6338.44,1768.49 6392.51,1768.49 6416.17,1792.15 R1.2 6445.46,1855.38 Q1.2 ; v1(6377.63,1466.08) J1.7@6448.94,1466.08
  Top Layer w20: v1(6190,1485) 6208.44,1485 6218.73,1474.71 ; v1(6280,1800) 6297.51,1782.49 6297.51,1768.49 ; U3.3 6337.85,1768.49 6297.51,1768.49 ; C7.2 6454.94,1693.37 v1(6455.02,1693.29) ; C7.2 6338.15,1693.38 6337.85,1693.69 6302.51,1693.69 6285.1,1711.09 6285.1,1756.09 6297.51,1768.49
  L3 w20: v1(6190,1485) 6280,1575 v1(6280,1800) ; v1(6377.63,1466.08) 6455.02,1543.46 v1(6455.02,1693.29)
  Bottom Layer w15: U9.3 6050.75,1454.25 6065,1440 6065,1435 6085,1415 6225,1415 6251.48,1441.48 v1(6251.48,1474.71) ; v1(6190,1485) 6200.29,1474.71 v1(6251.48,1474.71) ; J2.1 6255.69,1510.82 6255.69,1479.73 6251.48,1475.52 v1(6251.48,1474.71)
VDD1: C5.1 C6.2 C8.1 C13.2 C14.2 C15.2 J1.1 U2.B3 U2.B8 U2.H10 U2.J10 U2.K1 U2.K5 U3.5 U9.8 | length 1036.3
  Top Layer w10: C5.1 5744.17,1735.15 5743.23,1734.22 C15.2 5745.79,1688.53 C14.2 5768.88,1672.31 5772.66,1668.53 U2.J10 U2.H10 ; C8.1 5750.1,1799.09 C13.2 ; U2.K1 5790.97,1525.97 5791.58,1526.58 5791.9,1526.58 5799.62,1534.29 5799.62,1534.62 5805,1540 5805,1580.99 v2(5805.1,1581.09) U2.K5
  Top Layer w18: v2(5765.1,1711.09) v2(5790.1,1711.09)
  L2 w8: v3(5676.21,1553.53) 5674.88,1552.2 5587.8,1552.2 5521.92,1618.08 5521.92,1678.32 5536.58,1692.98 5596.97,1692.98 v2(5622.54,1667.41) 5646.12,1667.41 5664.21,1649.32 5664.21,1631.24 5671.24,1624.21 5674.43,1624.21 v3(5676.21,1622.43)
  L3 w10: v2(5622.54,1667.41) 5623.69,1666.26 5627.93,1666.26 5628.83,1665.37 5720.37,1665.37 5745,1690
  Bottom Layer w15: v2(5805.1,1581.09) 5805.29,1580.9 5814.1,1580.9 5819.5,1575.5 5844.5,1575.5 5881.17,1538.83 5881.17,1517.62 5881.54,1517.24 U9.8
  other v2: 6115.1,1621.09 6150.1,1621.09 6185.1,1621.09 6115.1,1656.09 6150.1,1656.09 6185.1,1656.09 6115.1,1691.09 6185.1,1691.09
VDD2: C17.2 U1.8 U5.1 U5.2 | length 181.9
  Top Layer w4: U5.2@5990.1,1536.09 U5.1@6040.1,1536.09 ; U1.8@6037.82,1663.81 U1.8@6040.1,1666.09 ; U1.8@6041.4,1683.5 6041.4,1615.78 6043.68,1613.5 U5.1
VDD2_ENABLE: U2.G1 U5.5 | length 292.7
  Top Layer w4: U2.G1 5745.1,1525.36 5754.67,1515.8 5770.04,1515.8 5802.56,1483.28 5843.12,1483.28 5890.1,1436.3 U5.5@5890.1,1326.09
VREAD: R4.2 R5.2 U2.A5 | length 120.2